# Altium PCB УШЯИ.467444.130.PcbDoc (part 1 of 4)
Units mm, origin at the board's own origin, x right, y up, seen from the top; angles counter-clockwise.
Board outline 280 x 190 mm, 6 copper layers (Top, GND, INT1, INT2, POWER, Bottom), stack 1.422 mm thick; 223 components, 176 nets, 1081 pads, 326 vias.
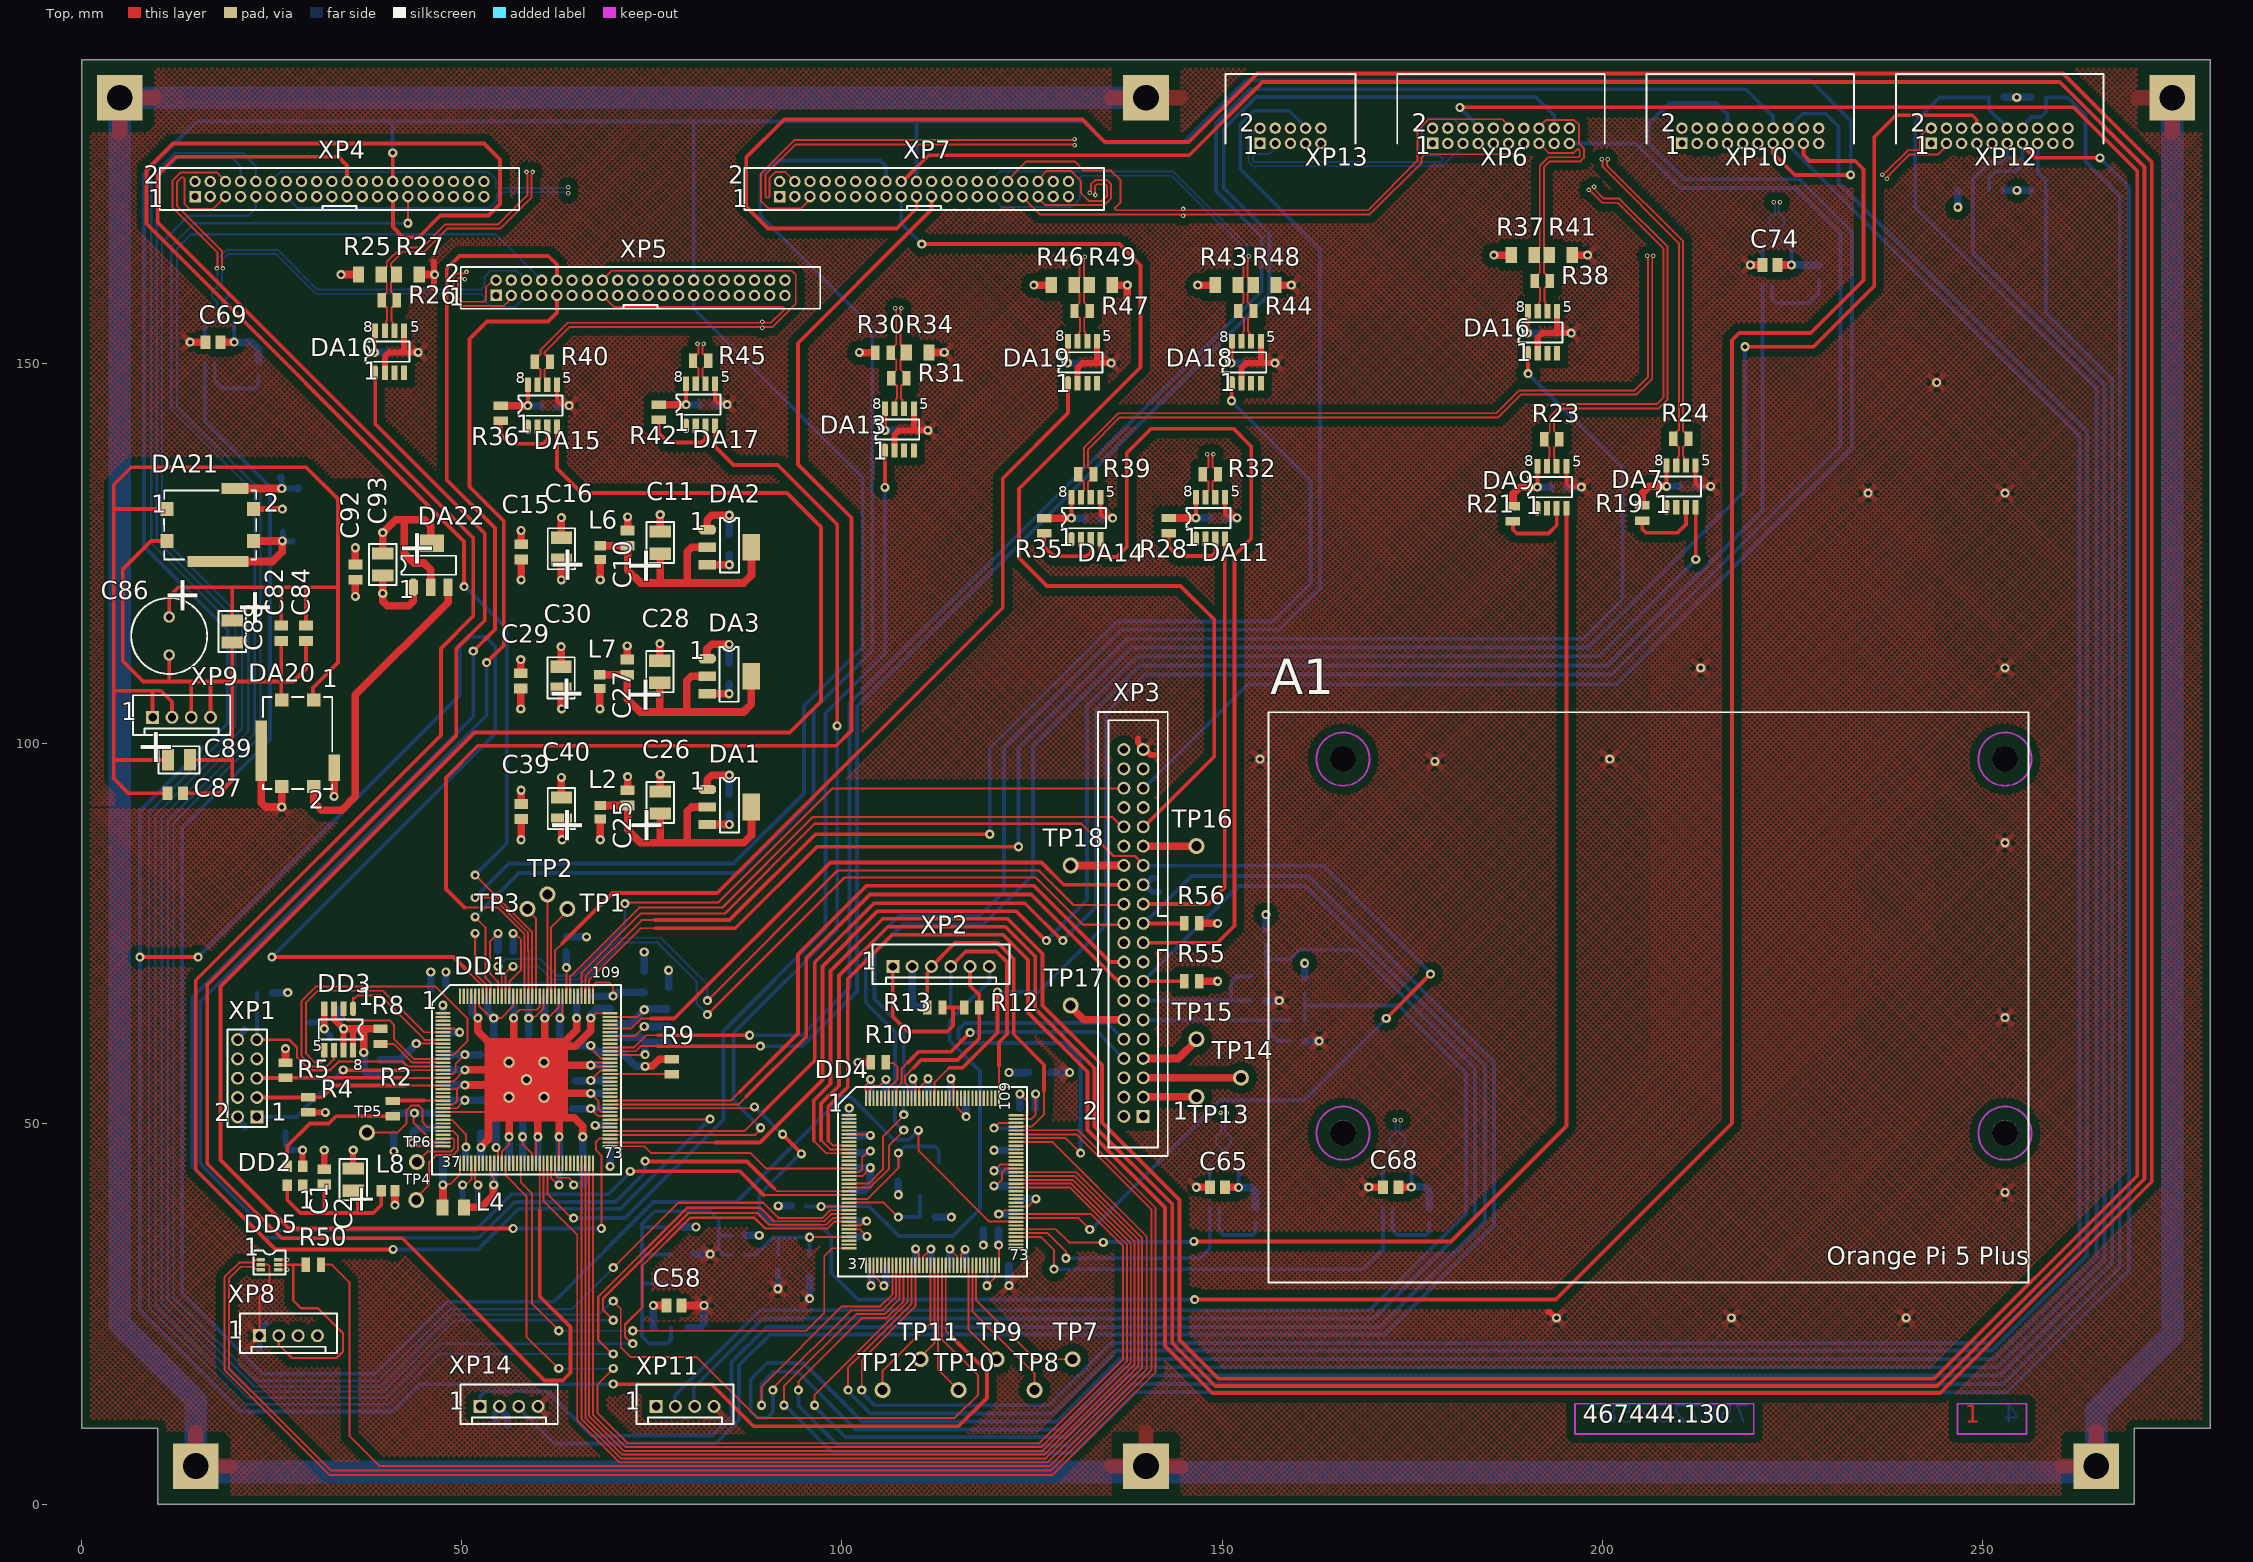
[diagram p0: Top view]
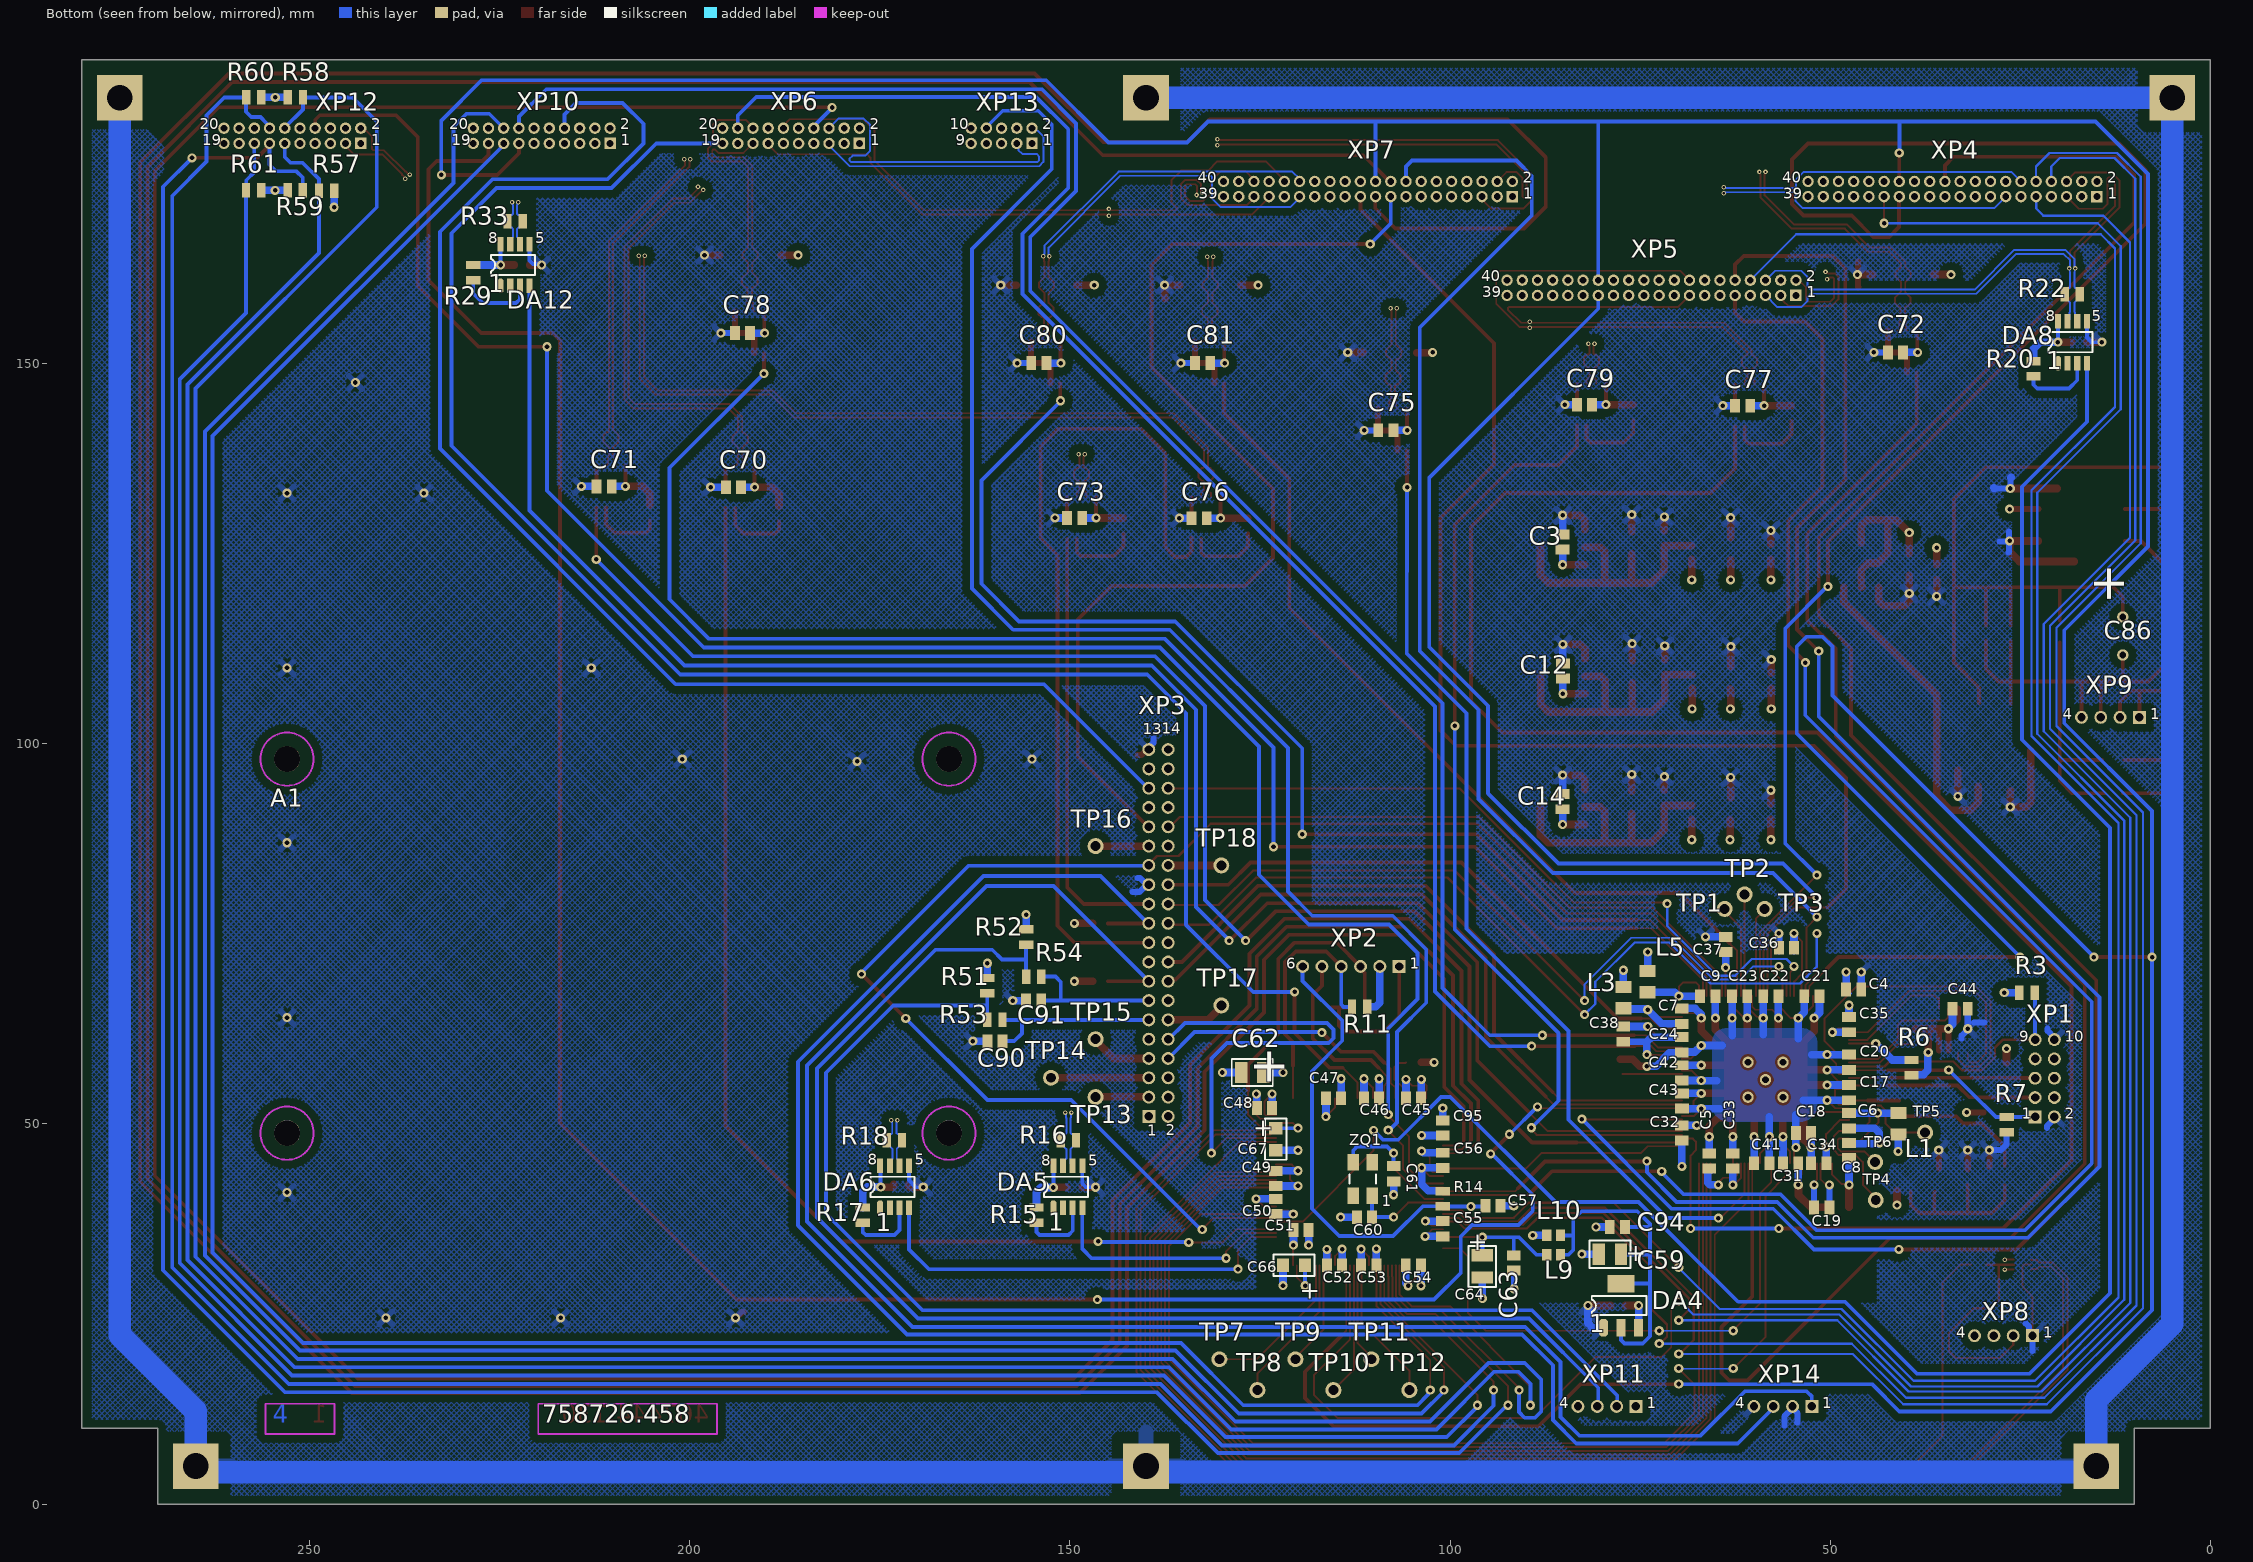
[diagram p1: Bottom view, seen from below]
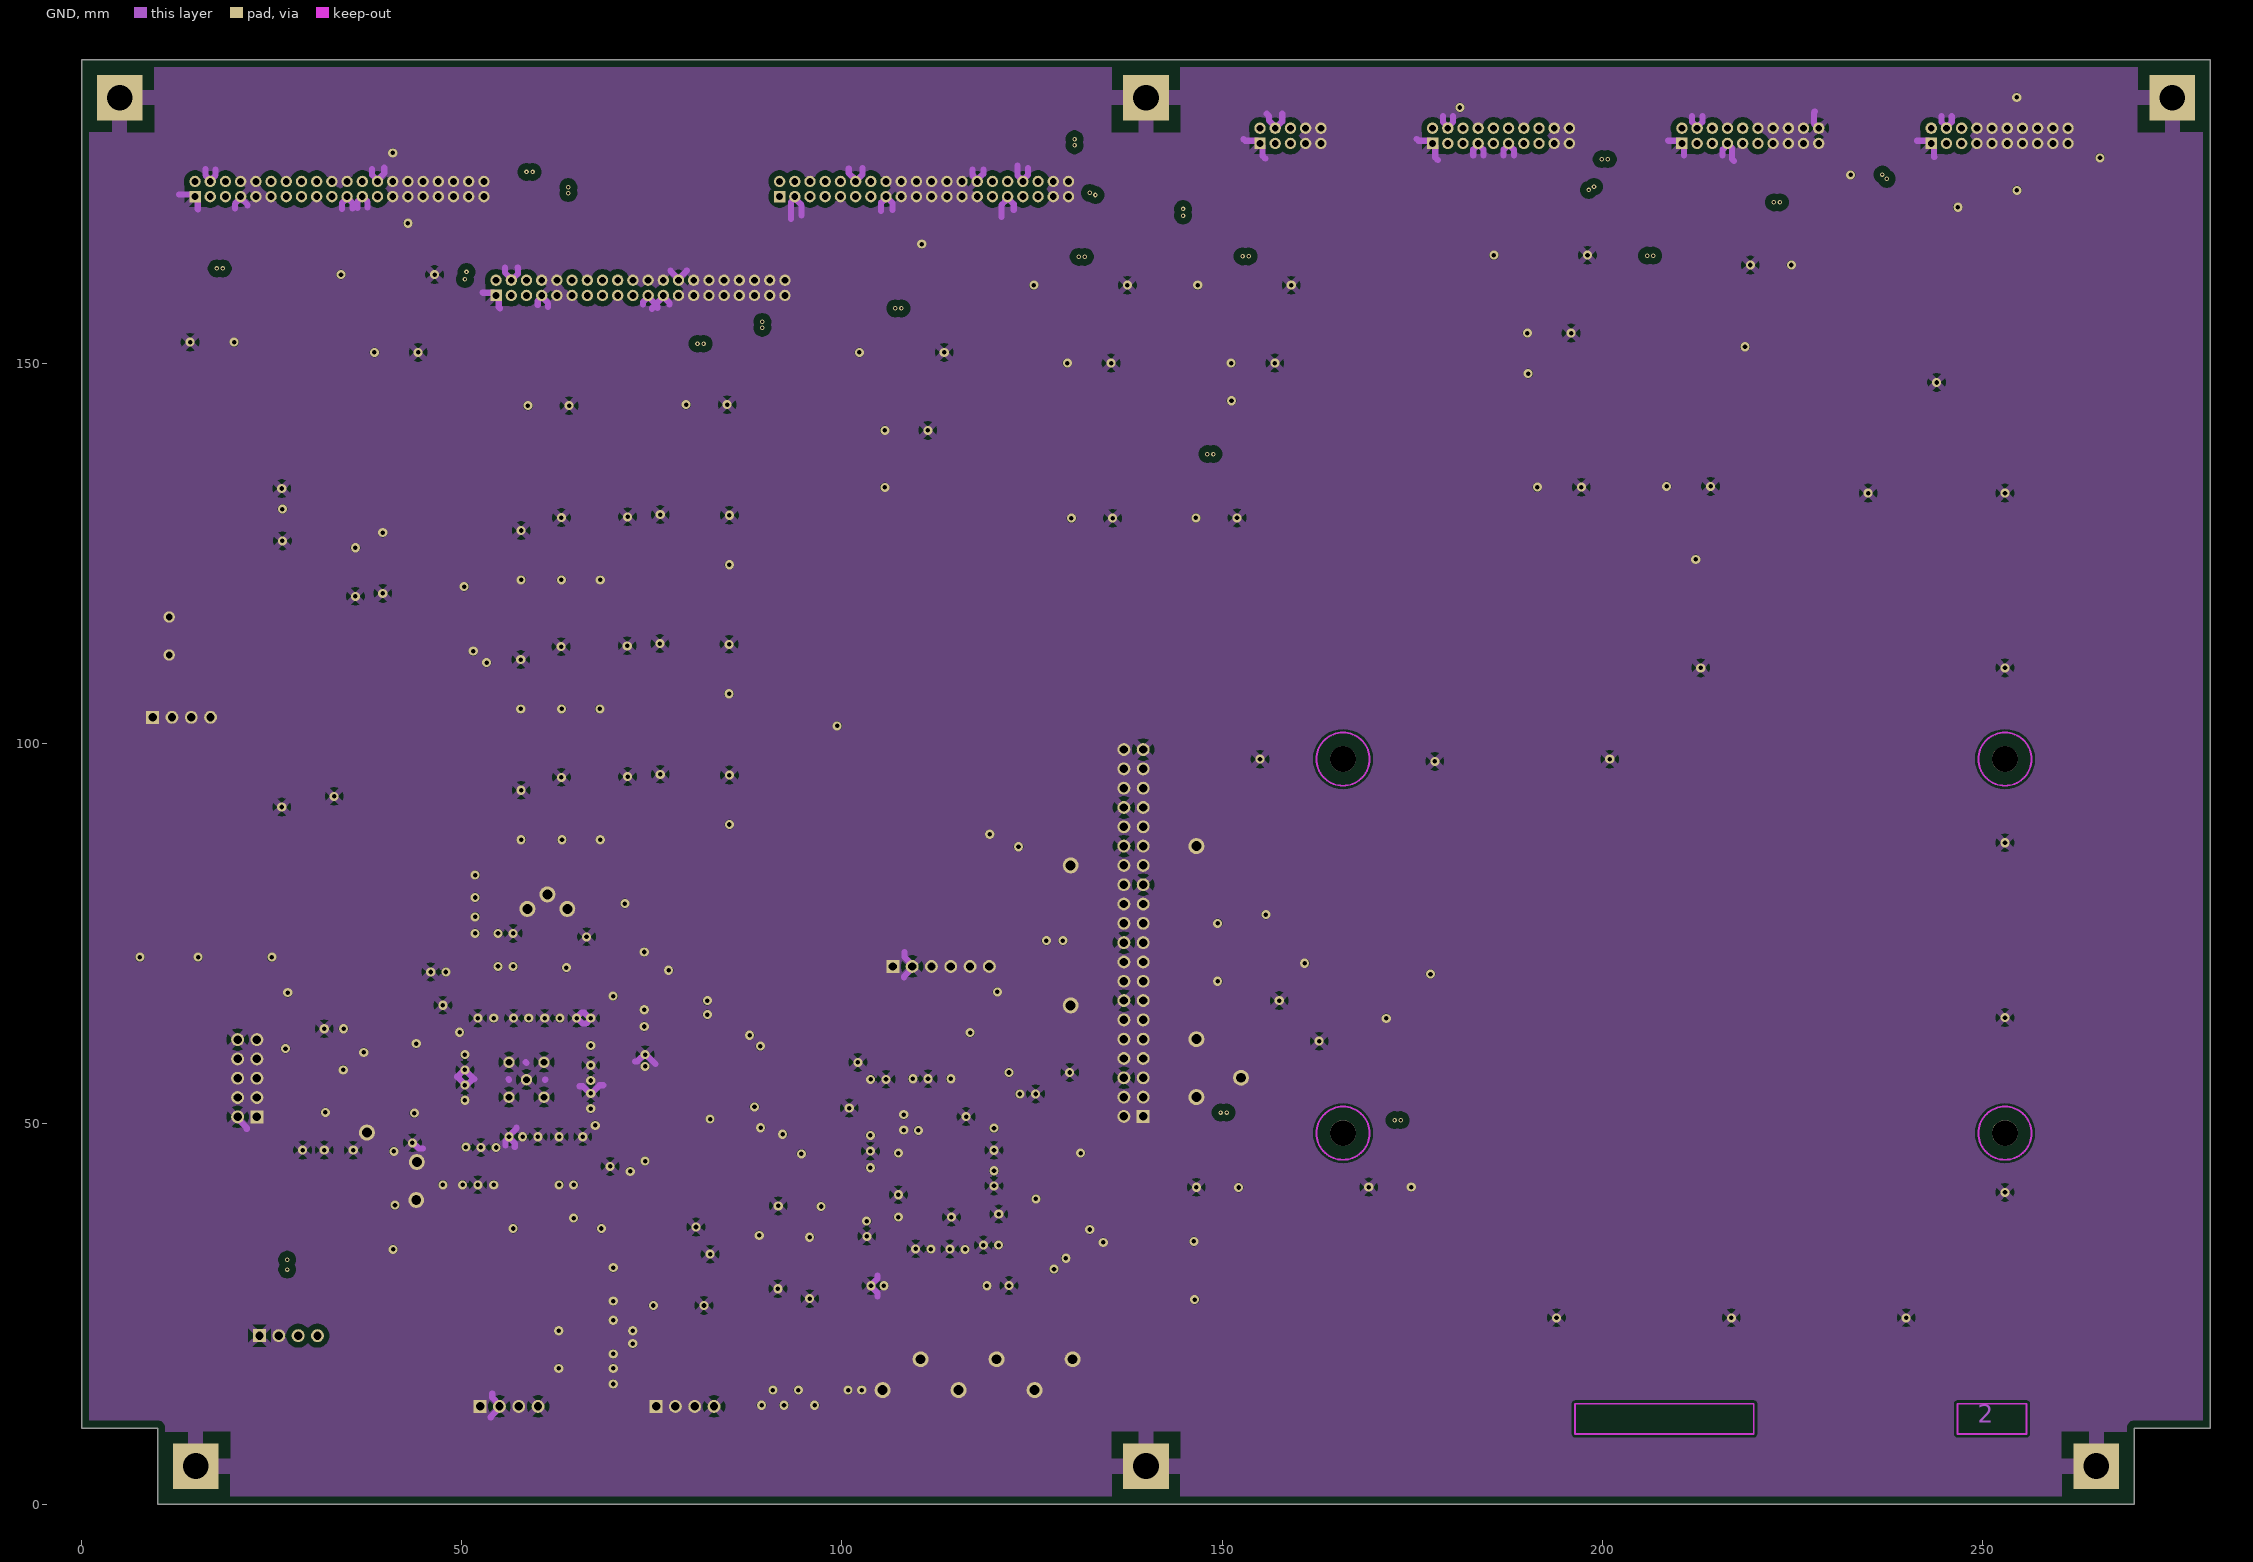
[diagram p2: GND]
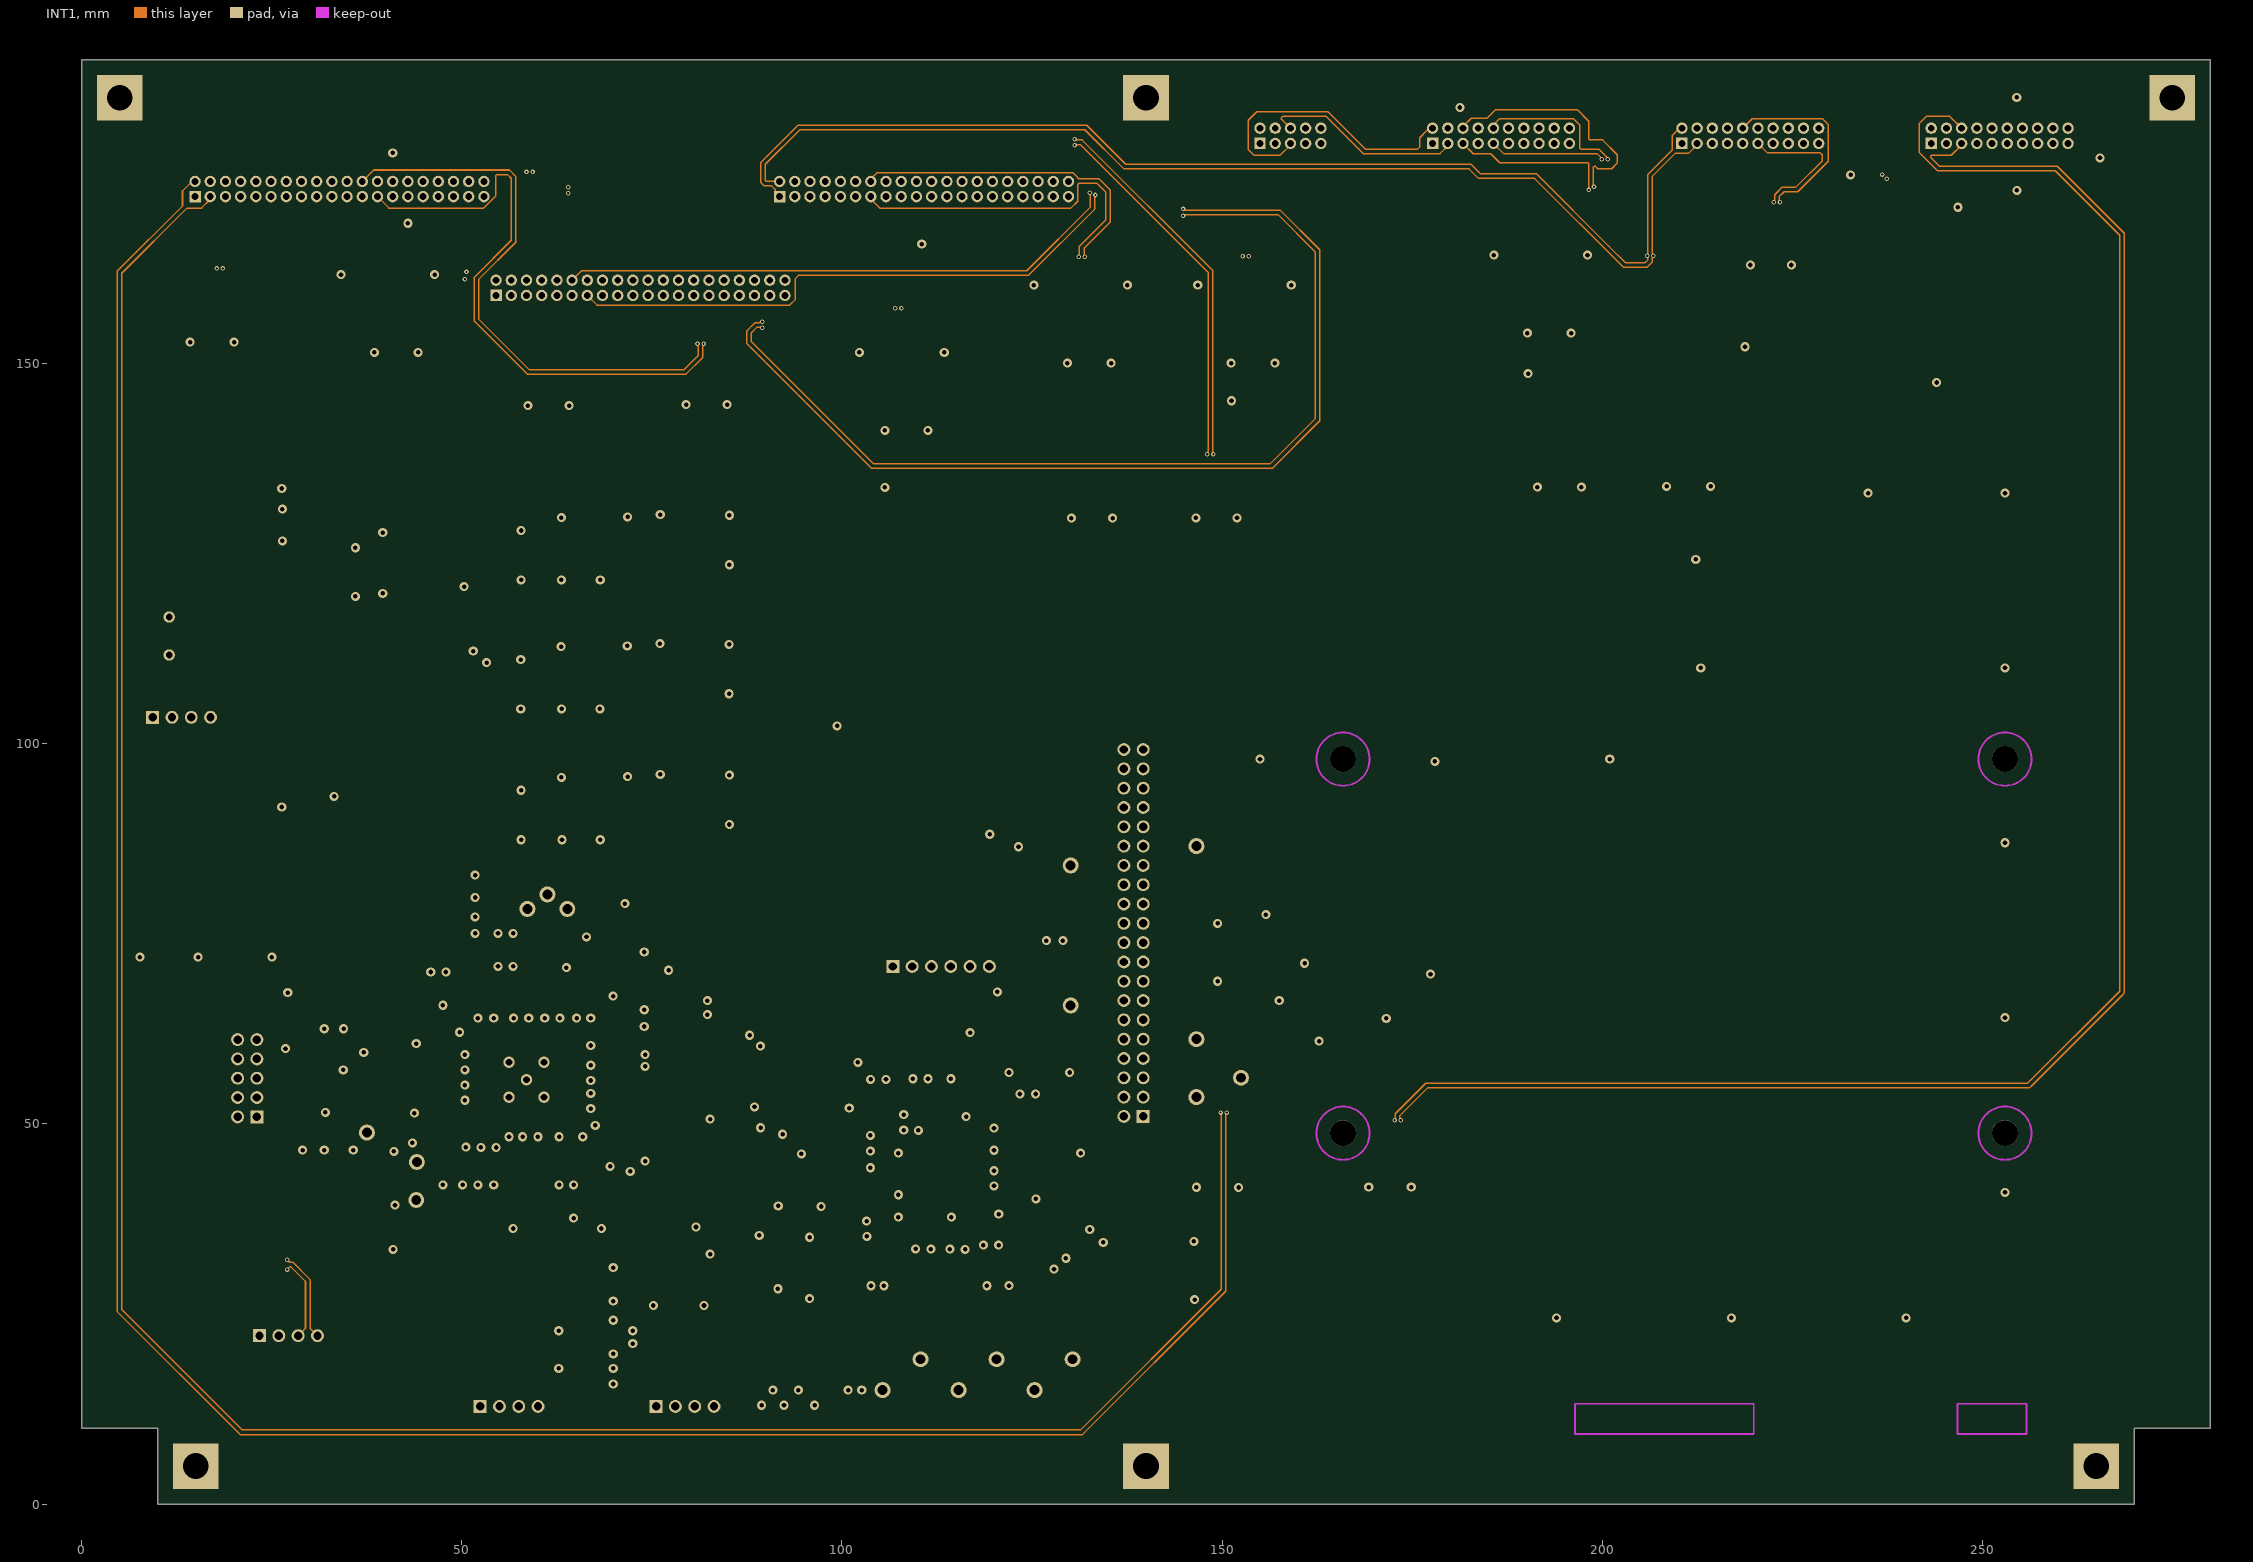
[diagram p3: INT1]
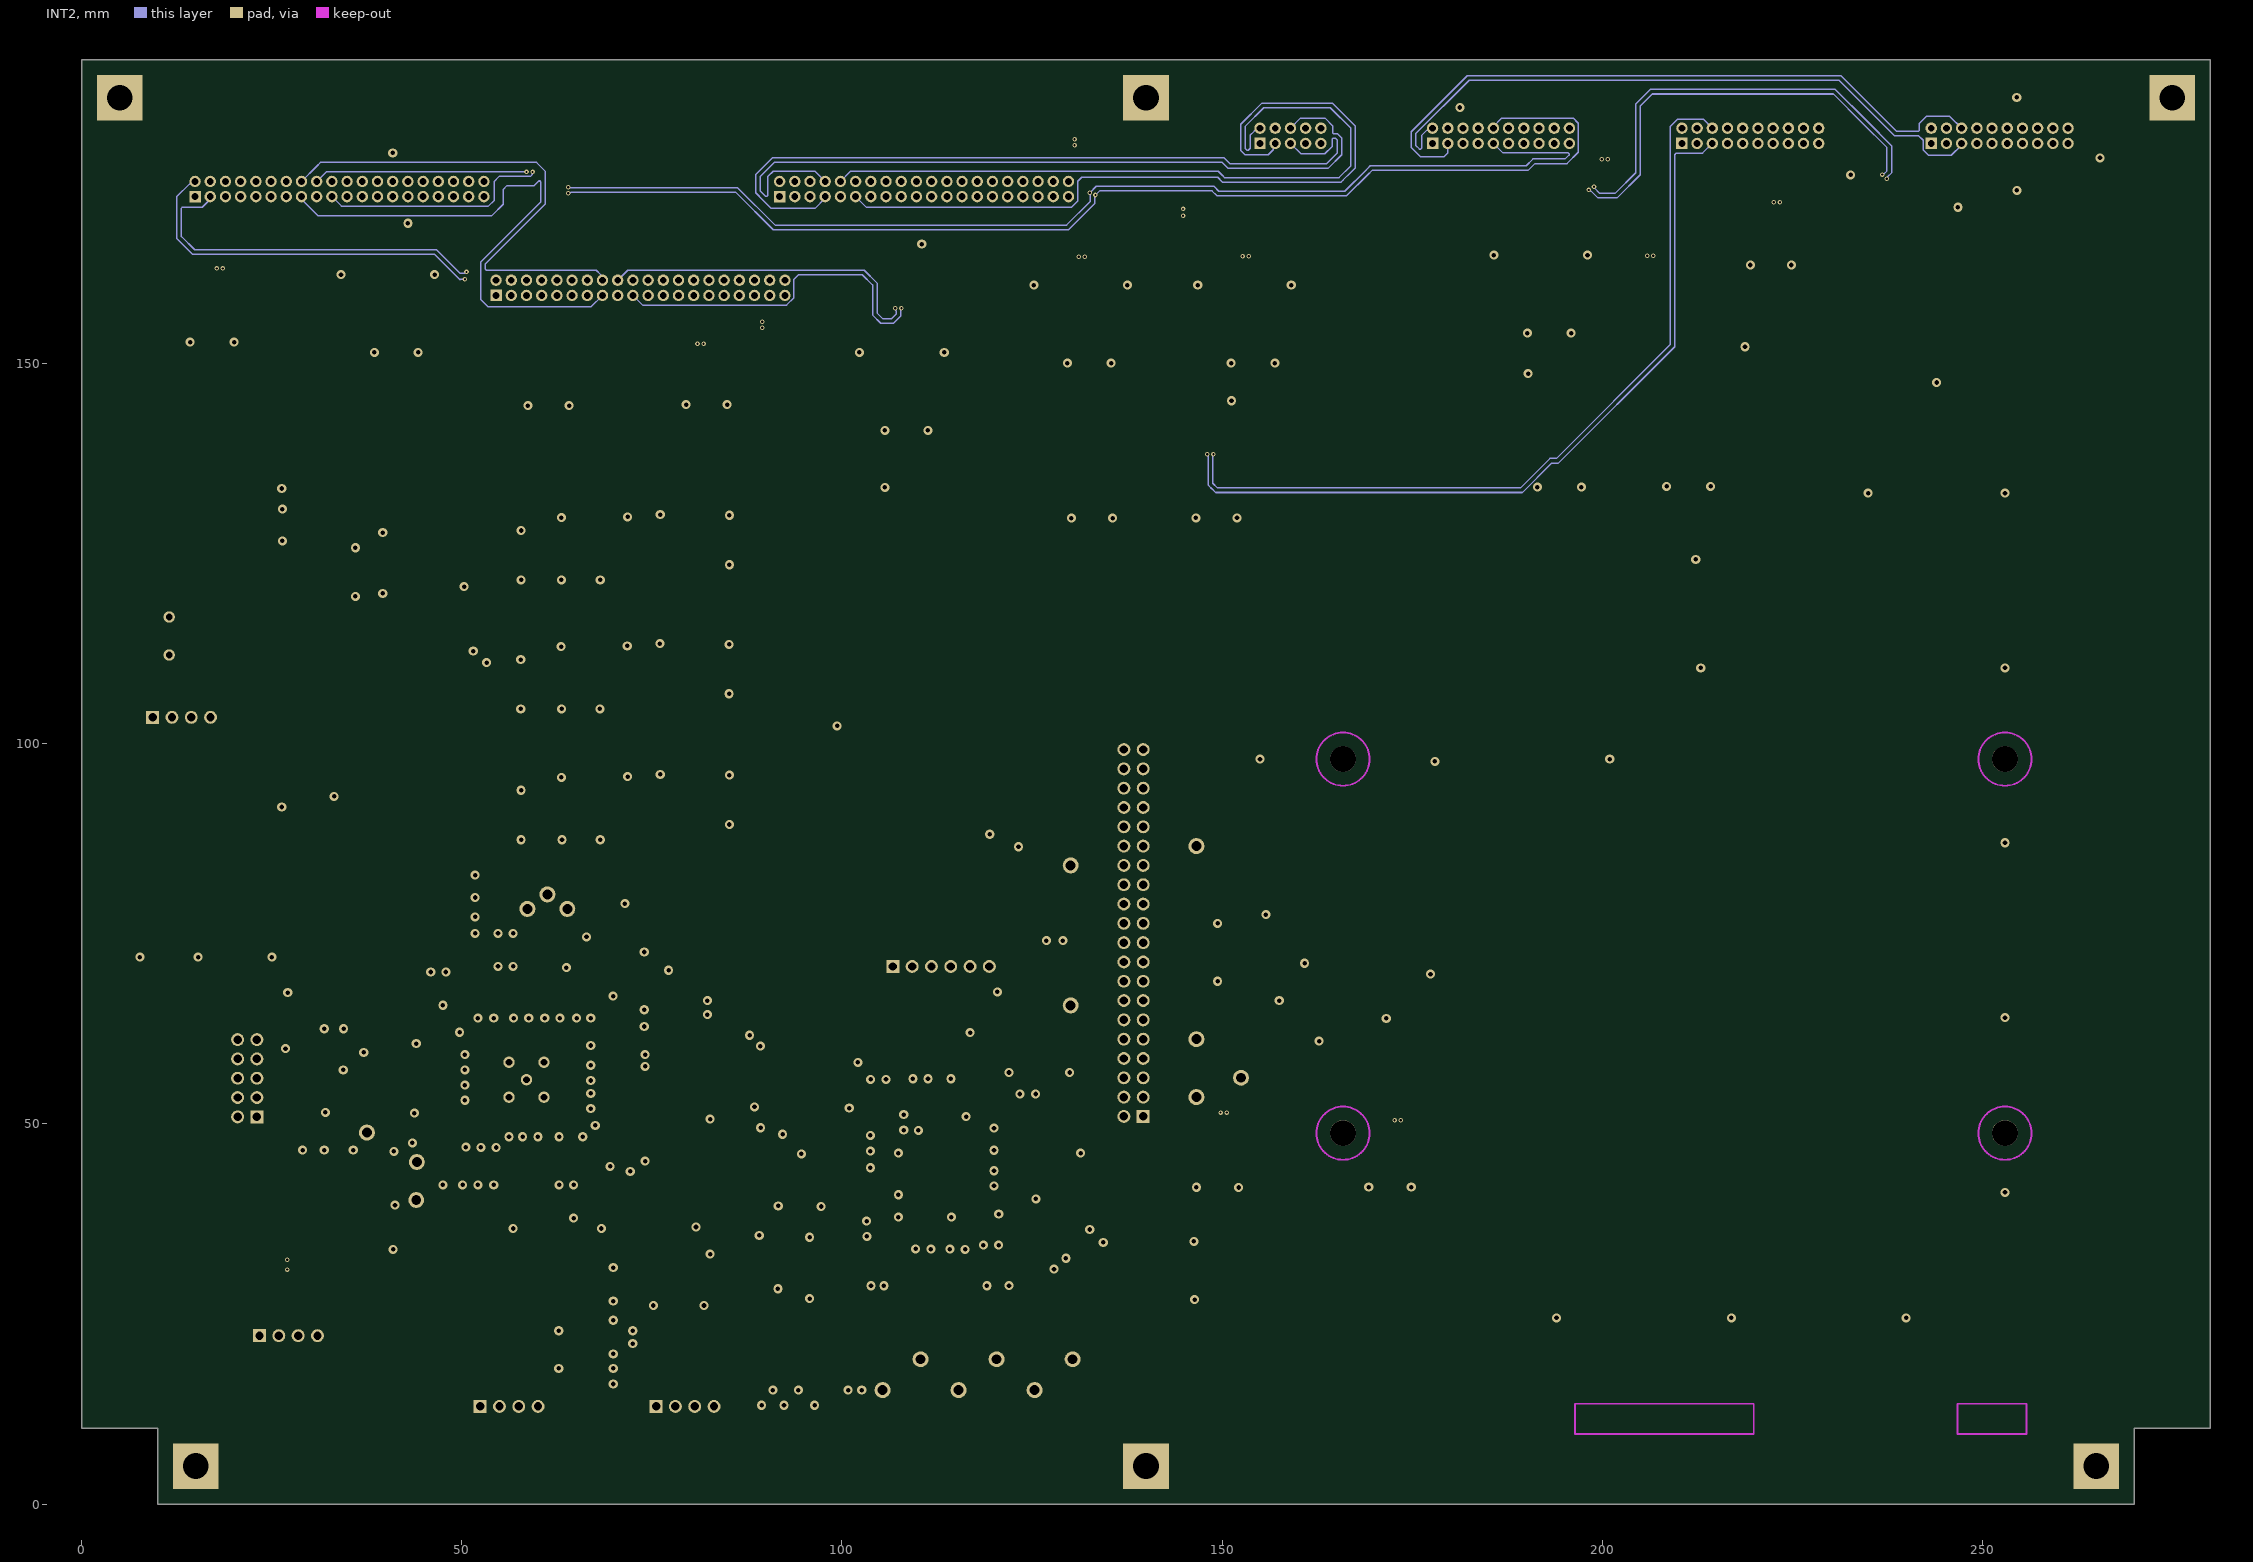
[diagram p4: INT2]
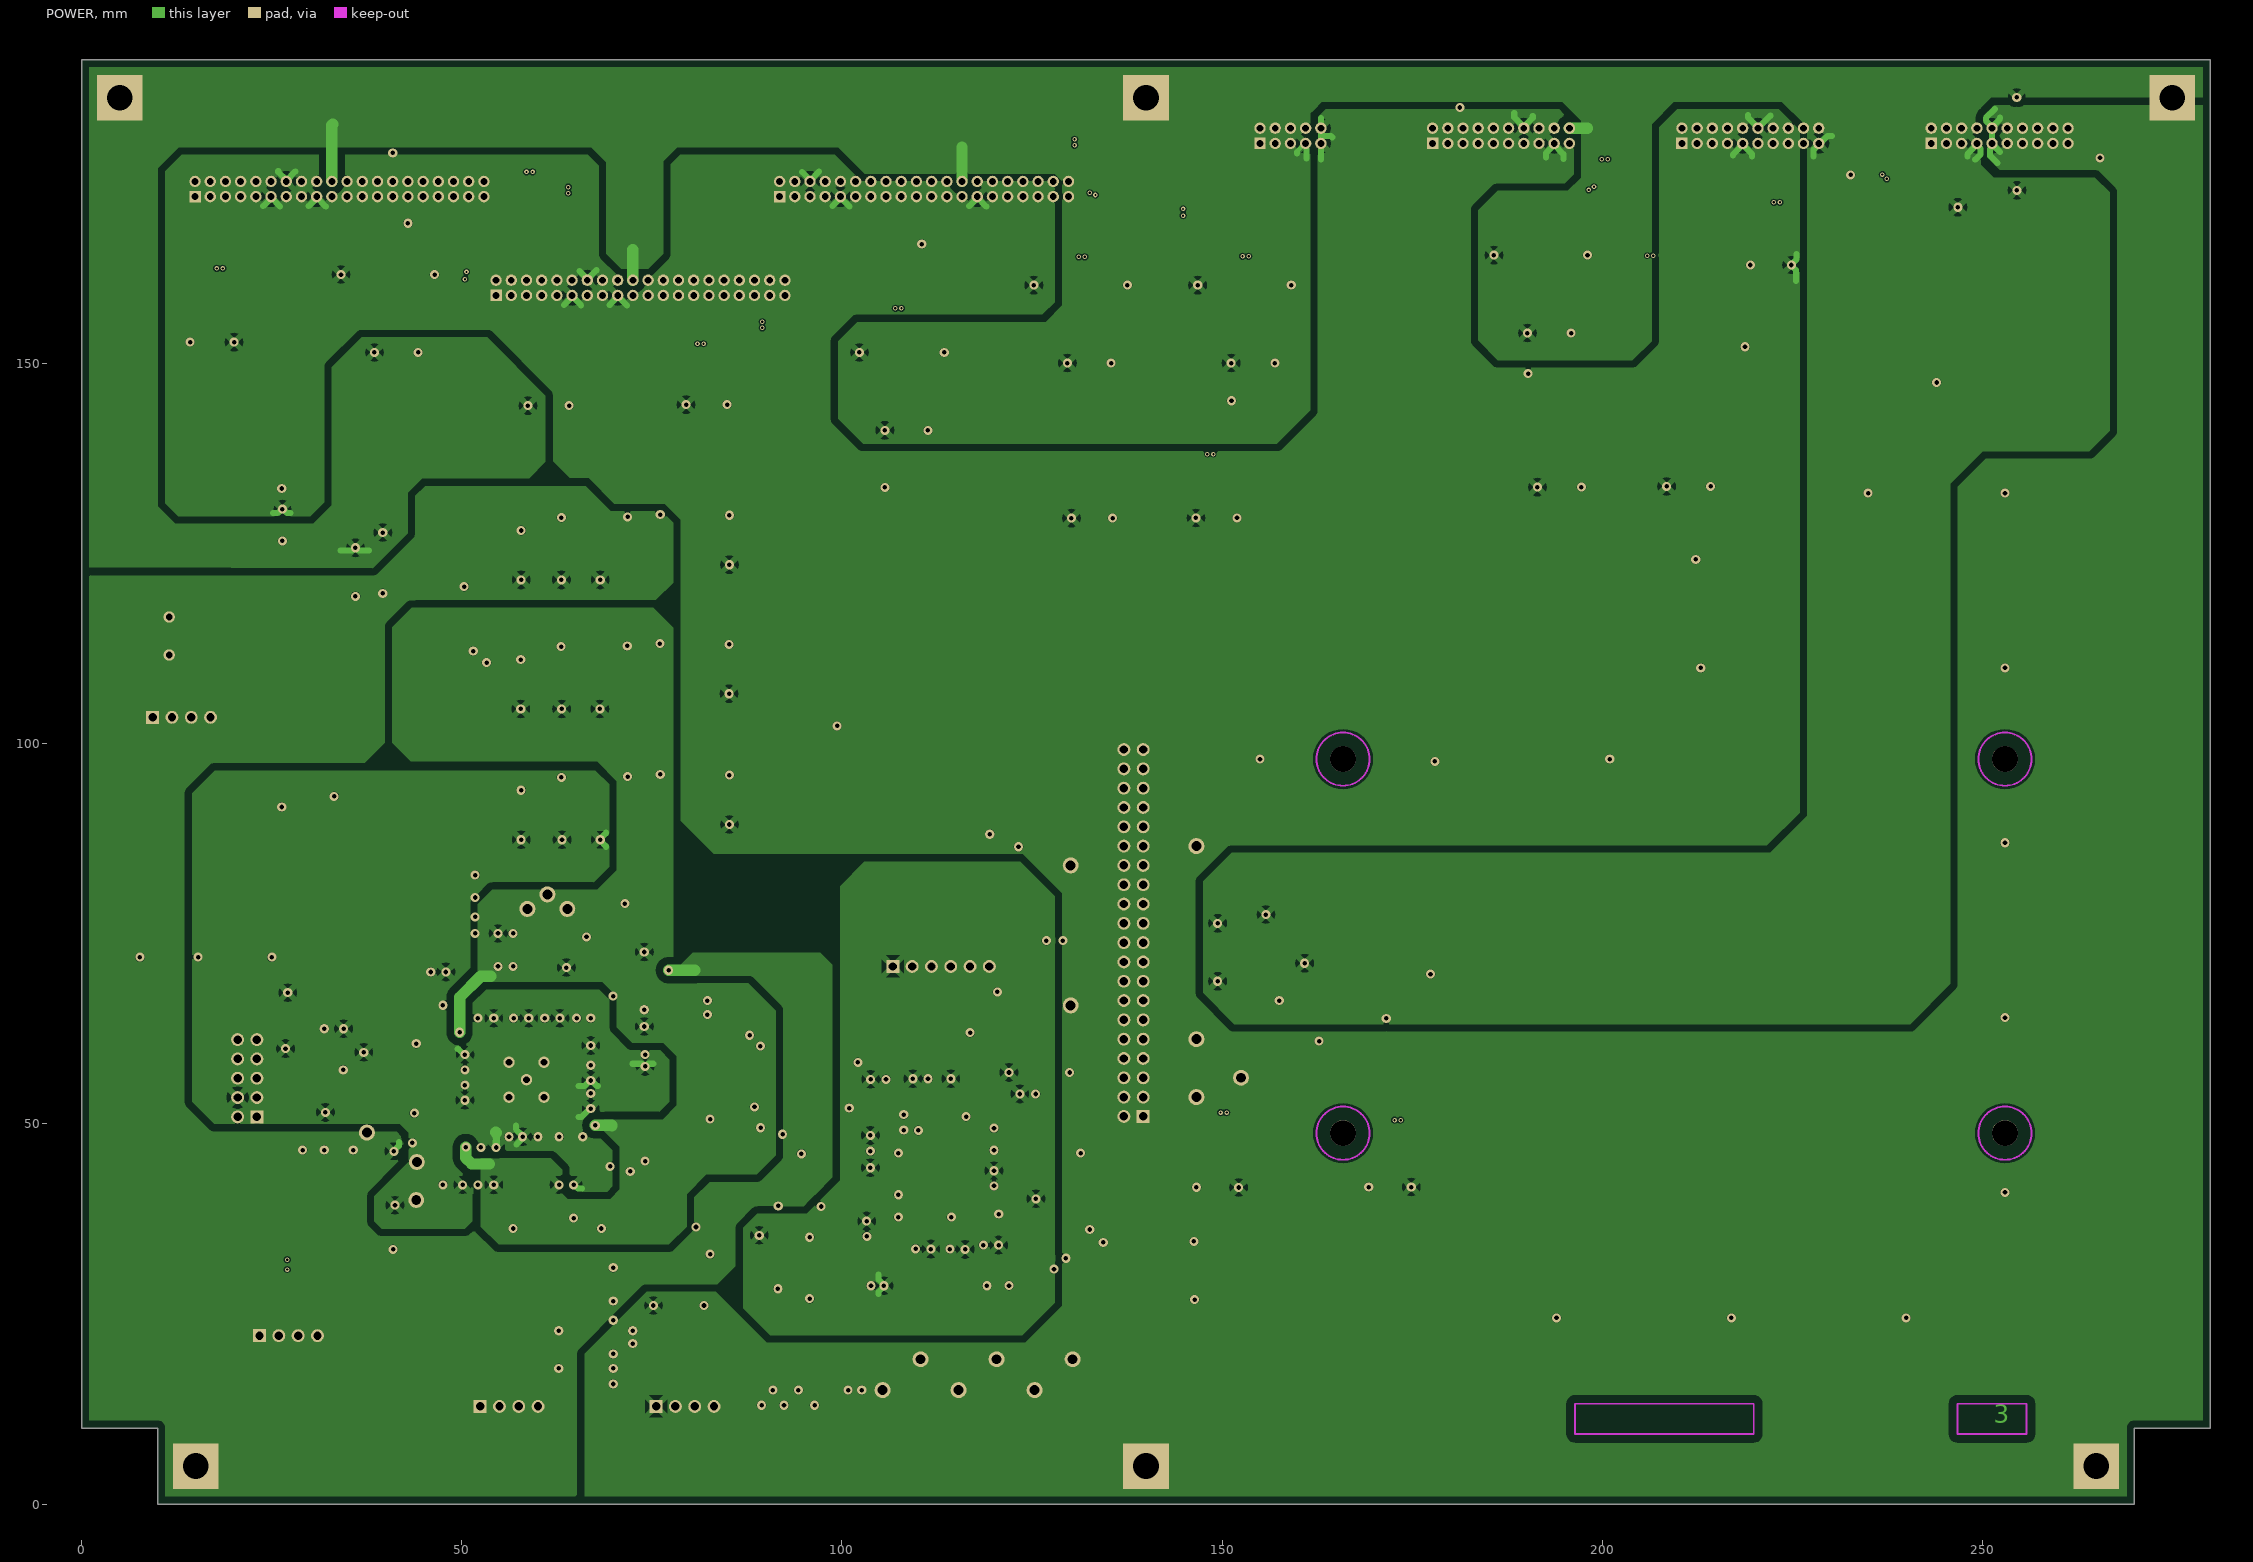
[diagram p5: POWER]

## Layer stack, top to bottom
Top Solder: solder mask 0.025, Solder Resist, Dk 3.5
Top: signal copper 0.035
Dielectric 4: prepreg 0.076, FR4 PR, Dk 3.6
Dielectric 2: prepreg 0.115, FR4 PR, Dk 4.2
GND: signal copper 0.035
Dielectric 8: core 0.3, FR4 Tg150, Dk 4.6
INT1: signal copper 0.035
Dielectric 6: prepreg 0.115, FR4 PR, Dk 4.2
Dielectric 7: prepreg 0.115, FR4 PR, Dk 4.2
INT2: signal copper 0.035
Dielectric 9: core 0.3, FR4 Tg150, Dk 4.6
POWER: signal copper 0.035
Dielectric 3: prepreg 0.115, FR4 PR, Dk 4.2
Dielectric 5: prepreg 0.076, FR4 PR, Dk 3.6
Bottom: signal copper 0.035
Bottom Solder: solder mask 0.025, Solder Resist, Dk 3.5

## Board outline
0,10 0,190 280,190 280,10 270,10 270,0 10,0 10,10

## Design rules (kind name [scope] priority, off if disabled: settings)
BoardOutlineClearance [All] p1: gap=1 ignorepadtopadclearanceinfootprint=FALSE
Clearance Clearance_Poly_GND2 [InNamedPolygon('GND2')] p1: gap=1 ignorepadtopadclearanceinfootprint=FALSE
Clearance Clearance_Poly_Kv_otv [InPolygon vs PadViaLibraryTemplate='s600h340'] p2: gap=1 ignorepadtopadclearanceinfootprint=FALSE
Clearance "Clearance_Poly POWER" [OnLayer('POWER')] p3: gap=0.2 ignorepadtopadclearanceinfootprint=FALSE except(0.3: Arc-Poly SMDPad-Poly THPad-Poly Via-Poly Fill-Poly; 1: Track-Poly Poly-Poly)
Clearance Clearance_DiffP [(InDifferentialPairClass('All Differential Pairs')) vs InAnyComponent] p4: gap=0.2 ignorepadtopadclearanceinfootprint=FALSE
Clearance Clearance_DiffP_All [(InDifferentialPairClass('All Differential Pairs'))] p5: gap=1 ignorepadtopadclearanceinfootprint=FALSE except(0.3: Arc-SMDPad Arc-THPad Arc-Via Track-SMDPad Track-THPad Track-Via SMDPad-SMDPad SMDPad-THPad SMDPad-Via THPad-THPad THPad-Via Via-Via; 0.5: Arc-Poly Track-Poly SMDPad-Poly THPad-Poly Via-Poly Fill-Poly Poly-Poly)
Clearance [All] p6: gap=0.2 ignorepadtopadclearanceinfootprint=FALSE except(0.3: Arc-Poly Track-Poly SMDPad-Poly THPad-Poly Via-Poly Fill-Poly; 1: Poly-Poly)
ComponentClearance [All] p1: gap=0 collisioncheckmode=3 verticalgap=0 showdistances=FALSE
DiffPairsRouting DiffPairsRouting_DD4 [All] p1: maxlimit=10 minlimit=0.3 mostfreqgap=0.4 toplayer_prefgap=0.3 toplayer_minwidth=0.25 toplayer_maxwidth=0.25 toplayer_prefwidth=0.25 midlayer3_mingap=0.4 midlayer3_minwidth=0.2 midlayer3_maxwidth=0.2 midlayer3_prefwidth=0.2 midlayer4_mingap=0.4 midlayer4_minwidth=0.2 midlayer4_maxwidth=0.2 midlayer4_prefwidth=0.2 bottomlayer_prefgap=0.3 bottomlayer_minwidth=0.25 bottomlayer_maxwidth=0.25 bottomlayer_prefwidth=0.25 impedanceprofiledriven=TRUE impedanceprofileid={D3FE438F-0D00-4736-99FF-3469C513B1AF} impedanceprofilevalue=100.000000 maxuncoupledlength=40
Height [All] p1: minheight=0 maxheight=80 prefheight=12.7
HoleSize [All] p1: absolutevalues=TRUE maxlimit=6 minlimit=0.3 maxpercent=80.000 minpercent=20.000
HoleToHoleClearance HoleToHoleClearance_1 [(InDifferentialPairClass('All Differential Pairs'))] p1: gap=0.5 allowstackedmicrovias=TRUE
HoleToHoleClearance [All] p2: gap=0.75 allowstackedmicrovias=TRUE
MinimumSolderMaskSliver MinimumSolderMaskSliver_DD1,4,5 [InComponent('DD1')or InComponent('DD4')or InComponent('DD5')] p1: minsoldermaskwidth=0.1
MinimumSolderMaskSliver [All] p2: minsoldermaskwidth=0.25
PlaneClearance [All] p1: clearance=0.5
PlaneConnect [All] p1: planeconnectstyle=Relief reliefexpansion=0.5 reliefentries=4 reliefconductorwidth=0.3 reliefairgap=0.3
PolygonConnect PolygonConnect_kv_otv [PadViaLibraryTemplate='s600h340'] p1: connectstyle=Relief reliefconductorwidth=2 reliefentries=4 polygonreliefangle="90 Angle" airgapwidth=1.5
PolygonConnect [All] p2: connectstyle=Relief reliefconductorwidth=0.8 reliefentries=4 polygonreliefangle="45 Angle" airgapwidth=0.6
RoomDefinition DA8 [InComponentClass('DA8')] p1: confinementstyle=ConfineIn formatcopy=TRUE lockcomponents=TRUE outline 29.85,145.85 13.35,145.85 13.35,163.55 29.85,163.55
RoomDefinition DA7 [InComponentClass('DA7')] p2: confinementstyle=ConfineIn formatcopy=TRUE lockcomponents=TRUE outline 198.675,126.875 215.175,126.875 215.175,144.575 198.675,144.575
RoomDefinition DA12 [InComponentClass('DA12')] p3: confinementstyle=ConfineIn formatcopy=TRUE lockcomponents=FALSE outline 232.5,155.75 216.25,155.75 216.25,173.5 232.5,173.5
RoomDefinition DA15 [InComponentClass('DA15')] p4: confinementstyle=ConfineIn formatcopy=TRUE lockcomponents=TRUE outline 51.1,137.25 67.35,137.25 67.35,155 51.1,155
RoomDefinition DA13 [InComponentClass('DA13')] p5: confinementstyle=ConfineIn formatcopy=TRUE lockcomponents=TRUE outline 96.95,135.847 115.45,135.847 115.45,156.347 96.95,156.347
RoomDefinition DA17 [InComponentClass('DA17')] p6: confinementstyle=ConfineIn formatcopy=TRUE lockcomponents=TRUE outline 71.9,137.384 88.15,137.384 88.15,155.134 71.9,155.134
RoomDefinition DA18 [InComponentClass('DA18')] p7: confinementstyle=ConfineIn formatcopy=TRUE lockcomponents=TRUE outline 142.6,144.7 161.1,144.7 161.1,165.2 142.6,165.2
RoomDefinition Class_+2.5V [InComponentClass('Class_+2.5V')] p8: confinementstyle=ConfineIn formatcopy=TRUE lockcomponents=TRUE outline 54.8,120.2 91.4,120.2 91.4,135.175 54.8,135.175
RoomDefinition DA9 [InComponentClass('DA9')] p9: confinementstyle=ConfineIn formatcopy=TRUE lockcomponents=TRUE outline 181.675,126.775 198.175,126.775 198.175,144.475 181.675,144.475
RoomDefinition Class_VCCIO [InComponentClass('Class_VCCIO')] p10: confinementstyle=ConfineIn formatcopy=TRUE lockcomponents=TRUE outline 54.8,86.025 91.4,86.025 91.4,101 54.8,101
RoomDefinition Class_VCINT [InComponentClass('Class_VCINT')] p11: confinementstyle=ConfineIn formatcopy=TRUE lockcomponents=TRUE outline 54.75,103.225 91.35,103.225 91.35,118.2 54.75,118.2
RoomDefinition DA10 [InComponentClass('DA10')] p12: confinementstyle=ConfineIn formatcopy=TRUE lockcomponents=TRUE outline 29.9,146.1 48.4,146.1 48.4,166.6 29.9,166.6
RoomDefinition DA11 [InComponentClass('DA11')] p13: confinementstyle=ConfineIn formatcopy=TRUE lockcomponents=TRUE outline 138.975,122.475 155.225,122.475 155.225,140.225 138.975,140.225
RoomDefinition DA16 [InComponentClass('DA16')] p14: confinementstyle=ConfineIn formatcopy=TRUE lockcomponents=TRUE outline 181.575,148.65 200.075,148.65 200.075,169.15 181.575,169.15
RoomDefinition DA19 [InComponentClass('DA19')] p15: confinementstyle=ConfineIn formatcopy=TRUE lockcomponents=TRUE outline 121.05,144.7 139.55,144.7 139.55,165.2 121.05,165.2
RoomDefinition DA14 [InComponentClass('DA14')] p16: confinementstyle=ConfineIn formatcopy=TRUE lockcomponents=TRUE outline 122.6,122.45 138.85,122.45 138.85,140.2 122.6,140.2
RoutingCorners [All] p1: cornerstyle=45-Degree minsetback=2.5 maxsetback=2.5
RoutingVias RoutingVias_DfP [InDifferentialPairClass('All Differential Pairs')] p1: holewidth=0.3 width=0.6 viastyle="Through Hole" minholewidth=0.3 minwidth=0.6 maxholewidth=0.3 maxwidth=0.6
RoutingVias [All] p2: holewidth=0.6 width=1.2 viastyle="Through Hole" minholewidth=0.3 minwidth=0.6 maxholewidth=0.9 maxwidth=1.5
SilkToSilkClearance [All] p1: silktosilkclearance=0.3
SilkToSolderMaskClearance [IsPad] p1: minsilkscreentomaskgap=0.25 clearancetoexposedcopper=TRUE
SolderMaskExpansion [All] p1: expansion=0.05 istentingtop=FALSE
SupplyNets "Schematic Supply Nets_11" [InNet('VCINT')] p1: voltage=0.000
SupplyNets "Schematic Supply Nets_10" [InNet('GND')] p2: voltage=0.000
SupplyNets "Schematic Supply Nets_9" [InNet('VCCA1')] p3: voltage=0.000
SupplyNets "Schematic Supply Nets_8" [InNet('AVCST')] p4: voltage=0.000
SupplyNets "Schematic Supply Nets_7" [InNet('DVCST')] p5: voltage=0.000
SupplyNets "Schematic Supply Nets_6" [InNet('VCC_PL1')] p6: voltage=0.000
SupplyNets "Schematic Supply Nets_5" [InNet('+3.3VB')] p7: voltage=0.000
SupplyNets "Schematic Supply Nets_4" [InNet('VCCA2')] p8: voltage=0.000
SupplyNets "Schematic Supply Nets_3" [InNet('VCC_PL2')] p9: voltage=0.000
SupplyNets "Schematic Supply Nets_2" [InNet('+2.5V')] p10: voltage=0.000
SupplyNets "Schematic Supply Nets_1" [InNet('VCCIO')] p11: voltage=0.000
SupplyNets "Schematic Supply Nets" [InNet('+5V')] p12: voltage=0.000
ViasUnderSMD [All] p1: allowed=FALSE
Width Width_DD4 [InComponent('DD4')] p1: maxlimit=5 minlimit=0.25 preferedwidth=0.25
Width [All] p2: maxlimit=5 minlimit=0.25 preferedwidth=0.3
19 further rules are at their usual default settings.

## Classes and differential pairs
component class DA9: C70 DA9 R21 R23
component class DA8: C69 DA8 R20 R22
component class DA7: C71 DA7 R19 R24
component class DA19: C81 DA19 R46 R47 R49
component class DA18: C80 DA18 R43 R44 R48
component class DA17: C79 DA17 R42 R45
component class DA16: C78 DA16 R37 R38 R41
component class DA15: C77 DA15 R36 R40
component class DA14: C76 DA14 R35 R39
component class DA13: C75 DA13 R30 R31 R34
component class DA12: C74 DA12 R29 R33
component class DA11: C73 DA11 R28 R32
component class DA10: C72 DA10 R25 R26 R27
component class Class_VCINT: C12 C27 C28 C29 C30 DA3 L7
component class Class_VCCIO: C14 C25 C26 C39 C40 DA1 L2
component class Class_+2.5V: C3 C10 C11 C15 C16 DA2 L6
component class УШЯИ.467444.130Э3_5: C90 C91 R51 R52 R53 R54 R55 R56 R57 R58 R59 R60 R61 XP10 XP11 XP12 XP13 XP14
component class УШЯИ.467444.130Э3_4: C82 C84 C86 C87 C88 C89 C92 C93 DA20 DA21 DA22 DD5 R50 TP13 TP14 TP15 TP16 TP17 TP18 XP3 XP4 XP5 XP6 XP7 XP8 XP9
component class УШЯИ.467444.130Э3_3: C72 C73 C74 C75 C76 C77 C78 C79 C80 C81 DA10 DA11 DA12 DA13 DA14 DA15 DA16 DA17 DA18 DA19 R25 R26 R27 R28 R29 R30 R31 R32 R33 R34 R35 R36 R37 R38 R39 R40 R41 R42 R43 R44 R45 R46 R47 R48 R49
component class УШЯИ.467444.130Э3_2: C45 C46 C47 C48 C49 C50 C51 C52 C53 C54 C55 C56 C57 C58 C59 C60 C61 C62 C63 C64 C65 C66 C67 C68 C69 C70 C71 C94 C95 DA4 DA5 DA6 DA7 DA8 DA9 DD4 L9 L10 R10 R11 R12 R13 R14 R15 R16 R17 R18 R19 R20 R21 R22 R23 R24 TP7 TP8 TP9 TP10 TP11 TP12 XP2 ZQ1
component class УШЯИ.467444.130Э3_1: A1 C1 C2 C3 C4 C5 C6 C7 C8 C9 C10 C11 C12 C14 C15 C16 C17 C18 C19 C20 C21 C22 C23 C24 C25 C26 C27 C28 C29 C30 C31 C32 C33 C34 C35 C36 C37 C38 C39 C40 C41 C42 C43 C44 DA1 DA2 DA3 DD1 DD2 DD3 L1 L2 L3 L4 L5 L6 L7 L8 R2 R3 R4 R5 R6 R7 R8 R9 TP1 TP2 TP3 TP4 TP5 TP6 XP1
differential pair RUN: +RUN_p -RUN_n
differential pair LINE: +LINE_p -LINE_n
differential pair IMPC: +IMPC_p -IMPC_n
differential pair IMPB: +IMPB_p -IMPB_n
differential pair DAT_DDAC: +DAT_DDAC_p -DAT_DDAC_n
differential pair DAT_ADC4: +DAT_ADC4_p -DAT_ADC4_n
differential pair DAT_ADC3: +DAT_ADC3_p -DAT_ADC3_n
differential pair DAT_ADC2: +DAT_ADC2_p -DAT_ADC2_n
differential pair DAT_ADC1: +DAT_ADC1_p -DAT_ADC1_n
differential pair DAT2_DAC: +DAT2_DAC_p -DAT2_DAC_n
differential pair DAT1_DAC: +DAT1_DAC_p -DAT1_DAC_n
differential pair D1: +D1_p -D1_n
differential pair D1A: +D1A_p -D1A_n
differential pair CLK_DDAC: +CLK_DDAC_p -CLK_DDAC_n
differential pair CLK_ADC: +CLK_ADC_p -CLK_ADC_n
differential pair CLK2_DAC: +CLK2_DAC_p -CLK2_DAC_n
differential pair CLK1_DAC: +CLK1_DAC_p -CLK1_DAC_n

## Components (designator, comment, footprint, x,y, rotation, side; value= is the part's Value field where it differs from the comment)
A1 "Orange Pi 5 Plus" Orange_Pi_5_Plus 253,98 r0 top locked
C1 "0,1 µF" "C_0805 [2012 Metric]" 31.899,43.049 r270 top
C2 "4,7 µF" "C+_1210 [3528-21 Metric]" 35.705,42.675 r90 top
C3 "0,1 µF" "C_0805 [2012 Metric]" 85.2,126.575 r270 bottom
C4 "1 µF" "C_0805 [2012 Metric]" 46.9,67.7 r0 bottom
C5 "1 µF" "C_0805 [2012 Metric]" 65.9,45.125 r270 bottom
C6 "0,1 µF" "C_0805 [2012 Metric]" 47.512,50.425 r90 bottom
C7 "0,1 µF" "C_0805 [2012 Metric]" 69.5,64.175 r270 bottom
C8 "0,1 µF" "C_0805 [2012 Metric]" 47.512,46.525 r270 bottom
C9 "0,1 µF" "C_0805 [2012 Metric]" 66.1,66.825 r0 bottom
C10 "0,1 µF" "C_0805 [2012 Metric]" 71.8,127.075 r270 top
C11 "4,7 µF" "C+_1210 [3528-21 Metric]" 76.1,126.475 r90 top
C12 "0,1 µF" "C_0805 [2012 Metric]" 85.15,109.6 r270 bottom
C14 "0,1 µF" "C_0805 [2012 Metric]" 85.2,92.4 r270 bottom
C15 "0,1 µF" "C_0805 [2012 Metric]" 57.8,125.275 r270 top
C16 "10 µF" "C+_1210 [3528-21 Metric]" 63.1,125.675 r90 top
C17 "0,1 µF" "C_0805 [2012 Metric]" 47.512,54.125 r270 bottom
C18 "0,1 µF" "C_0805 [2012 Metric]" 53.5,48.825 r0 bottom
C19 "0,1 µF" "C_0805 [2012 Metric]" 51.1,39.025 r180 bottom
C20 "0,1 µF" "C_0805 [2012 Metric]" 47.512,58.125 r90 bottom
C21 "0,1 µF" "C_0805 [2012 Metric]" 52.4,66.825 r0 bottom
C22 "0,1 µF" "C_0805 [2012 Metric]" 57.8,66.825 r0 bottom
C23 "0,1 µF" "C_0805 [2012 Metric]" 61.9,66.825 r0 bottom
C24 "0,1 µF" "C_0805 [2012 Metric]" 69.5,60.425 r270 bottom
C25 "0,1 µF" "C_0805 [2012 Metric]" 71.8,92.9 r270 top
C26 "4,7 µF" "C+_1210 [3528-21 Metric]" 76.1,92.3 r90 top
C27 "0,1 µF" "C_0805 [2012 Metric]" 71.75,110.1 r270 top
C28 "4,7 µF" "C+_1210 [3528-21 Metric]" 76.05,109.5 r90 top
C29 "0,1 µF" "C_0805 [2012 Metric]" 57.75,108.3 r270 top
C30 "4,7 µF" "C+_1210 [3528-21 Metric]" 63.05,108.7 r90 top
C31 "0,1 µF" "C_0805 [2012 Metric]" 55.2,44.825 r180 bottom
C32 "0,1 µF" "C_0805 [2012 Metric]" 69.5,48.825 r90 bottom
C33 "0,1 µF" "C_0805 [2012 Metric]" 62.8,45.125 r270 bottom
C34 "0,1 µF" "C_0805 [2012 Metric]" 51.5,44.825 r180 bottom
C35 "0,1 µF" "C_0805 [2012 Metric]" 47.512,63.075 r270 bottom
C36 "0,1 µF" "C_0805 [2012 Metric]" 55.75,73.2 r180 bottom
C37 "0,1 µF" "C_0805 [2012 Metric]" 63.75,73.625 r270 bottom
C38 "0,1 µF" "C_0805 [2012 Metric]" 77.2,61.825 r90 bottom
C39 "0,1 µF" "C_0805 [2012 Metric]" 57.8,91.1 r270 top
C40 "10 µF" "C+_1210 [3528-21 Metric]" 63.1,91.5 r90 top
C41 "0,1 µF" "C_0805 [2012 Metric]" 59,44.825 r180 bottom
C42 "0,1 µF" "C_0805 [2012 Metric]" 69.5,56.725 r270 bottom
C43 "0,1 µF" "C_0805 [2012 Metric]" 69.488,53.025 r270 bottom
C44 "0,1 µF" "C_0805 [2012 Metric]" 32.9,65.175 r0 bottom
C45 "0,1 µF" "C_0805 [2012 Metric]" 104.8,53.375 r180 bottom
C46 "0,1 µF" "C_0805 [2012 Metric]" 110.325,53.375 r180 bottom
C47 "0,1 µF" "C_0805 [2012 Metric]" 115.325,53.375 r180 bottom
C48 "0,1 µF" "C_0805 [2012 Metric]" 124.4,52.1 r180 bottom
C49 "0,1 µF" "C_0805 [2012 Metric]" 122.925,42.825 r90 bottom
C50 "0,1 µF" "C_0805 [2012 Metric]" 122.925,39.15 r90 bottom
C51 "0,1 µF" "C_0805 [2012 Metric]" 119.6,36.05 r0 bottom
C52 "0,1 µF" "C_0805 [2012 Metric]" 115.2,31.425 r0 bottom
C53 "0,1 µF" "C_0805 [2012 Metric]" 110.7,31.425 r0 bottom
C54 "0,1 µF" "C_0805 [2012 Metric]" 104.825,31.425 r0 bottom
C55 "0,1 µF" "C_0805 [2012 Metric]" 100.95,36.225 r90 bottom
C56 "0,1 µF" "C_0805 [2012 Metric]" 100.95,45.225 r270 bottom
C57 "0,1 µF" "C_0805 [2012 Metric]" 94.35,39.225 r0 bottom
C58 "0,1 µF" "C_0805 [2012 Metric]" 77.9,26.125 r0 top
C59 "4,7 µF" "C+_1210 [3528-21 Metric]" 78.981,32.85 r0 bottom
C60 "20 pF" "C_0805 [2012 Metric]" 111.25,37.75 r0 bottom
C61 "20 pF" "C_0805 [2012 Metric]" 107.425,43.45 r270 bottom
C62 "10 µF" "C+_1210 [3528-21 Metric]" 126.025,56.775 r0 bottom
C63 "0,1 µF" "C_0805 [2012 Metric]" 91.625,31.725 r90 bottom
C64 "10 µF" "C+_1210 [3528-21 Metric]" 95.75,31.275 r270 bottom
C65 "0,1 µF" "C_0805 [2012 Metric]" 149.4,41.7 r0 top
C66 "2,2 µF" "C+_1206 [3216-18 Metric]" 120.525,31.425 r0 bottom
C67 "2,2 µF" "C+_1206 [3216-18 Metric]" 122.925,48 r270 bottom
C68 "0,1 µF" "C_0805 [2012 Metric]" 172.2,41.7 r0 top
C69 "0,1 µF" "C_0805 [2012 Metric]" 17.25,152.85 r0 top
C70 "0,1 µF" "C_0805 [2012 Metric]" 194.275,133.775 r180 bottom
C71 "0,1 µF" "C_0805 [2012 Metric]" 211.275,133.875 r180 bottom
C72 "0,1 µF" "C_0805 [2012 Metric]" 41.4,151.5 r180 bottom
C73 "0,1 µF" "C_0805 [2012 Metric]" 149.38,129.725 r180 bottom
C74 "0,1 µF" "C_0805 [2012 Metric]" 222.095,163 r0 top
C75 "0,1 µF" "C_0805 [2012 Metric]" 108.45,141.247 r180 bottom
C76 "0,1 µF" "C_0805 [2012 Metric]" 133.005,129.7 r180 bottom
C77 "0,1 µF" "C_0805 [2012 Metric]" 61.505,144.5 r180 bottom
C78 "0,1 µF" "C_0805 [2012 Metric]" 193.075,154.05 r180 bottom
C79 "0,1 µF" "C_0805 [2012 Metric]" 82.305,144.634 r180 bottom
C80 "0,1 µF" "C_0805 [2012 Metric]" 154.1,150.1 r180 bottom
C81 "0,1 µF" "C_0805 [2012 Metric]" 132.55,150.1 r180 bottom
C82 "0,1 µF" "C_0805 [2012 Metric]" 26.25,114.563 r270 top
C84 "0,1 µF" "C_0805 [2012 Metric]" 29.5,114.563 r270 top
C86 "1000 µF" С_EXR_10x21 11.5,114.2 r270 top
C87 "0,1 µF" "C_0805 [2012 Metric]" 12.3,93.5 r180 top
C88 "10 µF" "C+_1210 [3528-21 Metric]" 19.8,114.8 r270 top
C89 "10 µF" "C+_1210 [3528-21 Metric]" 12.771,97.9 r0 top
C90 "0,1 µF" "C_0805 [2012 Metric]" 159.875,60.9 r0 bottom
C91 "0,1 µF" "C_0805 [2012 Metric]" 154.775,66.236 r0 bottom
C92 "0,1 µF" "C_0805 [2012 Metric]" 36,122.6 r90 top
C93 "10 µF" "C+_1210 [3528-21 Metric]" 39.6,123.6 r270 top
C94 "0,1 µF" "C_0805 [2012 Metric]" 78,36.45 r180 bottom
C95 "0,1 µF" "C_0805 [2012 Metric]" 100.95,49.475 r270 bottom
DA1 "LD1117AS33TR" SOT-223 85.2,91.7 r0 top
DA2 "LD1117AS25TR" SOT-223 85.2,125.875 r0 top
DA3 "LD1117AS12TR" SOT-223 85.15,108.9 r0 top
DA4 "LD1117AS33TR" SOT-223 77.506,26.1 r90 bottom
DA5 "ADM483AR" SOIC-8_1.27_5x4x1.75 150.28,41.742 r90 bottom
DA6 "ADM483AR" SOIC-8_1.27_5x4x1.75 173.07,41.742 r90 bottom
DA7 "ADM483AR" SOIC-8_1.27_5x4x1.75 210.394,133.875 r90 top
DA8 "ADM483AR" SOIC-8_1.27_5x4x1.75 18.131,152.85 r90 bottom
DA9 "ADM483AR" SOIC-8_1.27_5x4x1.75 193.394,133.775 r90 top
DA10 "SN65HVD75D" SOIC-8_1.27_5x4x1.75 40.5,151.6 r90 top
DA11 "ADM483AR" SOIC-8_1.27_5x4x1.75 148.475,129.725 r90 top
DA12 "ADM483AR" SOIC-8_1.27_5x4x1.75 223,163 r90 bottom
DA13 "SN65HVD75D" SOIC-8_1.27_5x4x1.75 107.55,141.347 r90 top
DA14 "ADM483AR" SOIC-8_1.27_5x4x1.75 132.1,129.7 r90 top
DA15 "SN65HVD75D" SOIC-8_1.27_5x4x1.75 60.6,144.5 r90 top
DA16 "SN65HVD75D" SOIC-8_1.27_5x4x1.75 192.175,154.15 r90 top
DA17 "ADM483AR" SOIC-8_1.27_5x4x1.75 81.4,144.634 r90 top
DA18 "SN65HVD75D" SOIC-8_1.27_5x4x1.75 153.2,150.2 r90 top
DA19 "SN65HVD75D" SOIC-8_1.27_5x4x1.75 131.65,150.2 r90 top
DA20 "BNX028-01" F_BNX028-01 28.4,100.1 r270 top
DA21 "BNX028-01" F_BNX028-01 16.903,128.8 r0 top
DA22 "LD1117AS33TR" SOT-223 45.9,123.5 r90 top
DD1 "EP3C5E144I7" EQFP-144[20x20]_0.5_22x22x1.6 58.5,55.825 r0 top locked
DD2 "O 20,0-JO32-B-3.3-1-T1-LF" JO32 28.05,43.175 r90 top
DD3 "EPCS4SI8N" SOIC-8_1.27_5x4x1.75 33.8,62.425 r270 top
DD4 "STM32F429VIT6STM32F407ZGTx" QFP-144[20x20]_0.5_22x22x1.6 111.912,42.4 r0 top locked
DD5 "USBUF01W6" SOT-323-6 24.7,31.5 r0 top
L1 "0,22 μH" IND_LQH31CN 41,50.025 r90 bottom
L2 "" "IND_0805 [2012 Metric]" 68.2,91 r270 top
L3 "0,22 μH" IND_LQH31CN 77.2,66.625 r270 bottom
L4 "0,22 μH" IND_LQH31CN 48.862,39.025 r180 top
L5 "0,22 μH" IND_LQH31CN 74,68.725 r270 bottom
L6 "" "IND_0805 [2012 Metric]" 68.2,125.175 r270 top
L7 "" "IND_0805 [2012 Metric]" 68.15,108.2 r270 top
L8 "" "IND_0805 [2012 Metric]" 40.3,41.225 r180 top
L9 "" "IND_0805 [2012 Metric]" 86.375,32.8 r0 bottom
L10 "" "IND_0805 [2012 Metric]" 86.375,35.35 r0 bottom
R2 "51R" "R_0805 [2012 Metric]" 40.9,52.025 r90 top
R3 "1k" "R_0805 [2012 Metric]" 24.1,67.275 r0 bottom
R4 "10k" "R_0805 [2012 Metric]" 29.8,52.525 r270 top
R5 "1k" "R_0805 [2012 Metric]" 26.8,57.075 r90 top
R6 "10k" "R_0805 [2012 Metric]" 39.3,57.425 r270 bottom
R7 "1k" "R_0805 [2012 Metric]" 26.773,49.925 r270 bottom
R8 "10k" "R_0805 [2012 Metric]" 39.3,61.525 r90 top
R9 "10k" "R_0805 [2012 Metric]" 77.6,57.525 r90 top
R10 "10k" "R_0805 [2012 Metric]" 104.775,58.1 r0 top
R11 "10k" "R_0805 [2012 Metric]" 111.9,65.4 r0 bottom
R12 "10k" "R_0805 [2012 Metric]" 117.075,65.325 r0 top
R13 "10k" "R_0805 [2012 Metric]" 112.225,65.325 r180 top
R14 "10k" "R_0805 [2012 Metric]" 100.95,40.175 r270 bottom
R15 "10k" "R_0805 [2012 Metric]" 154.405,38.017 r270 bottom
R16 "100R" "R_0805 [2012 Metric]" 150.205,47.842 r0 bottom
R17 "10k" "R_0805 [2012 Metric]" 177.275,38.017 r270 bottom
R18 "100R" "R_0805 [2012 Metric]" 173.1,47.842 r0 bottom
R19 "10k" "R_0805 [2012 Metric]" 205.275,130.375 r270 top
R20 "10k" "R_0805 [2012 Metric]" 23.25,149.35 r270 bottom
R21 "10k" "R_0805 [2012 Metric]" 188.275,130.275 r270 top
R22 "100R" "R_0805 [2012 Metric]" 18.15,159.15 r180 bottom
R23 "100R" "R_0805 [2012 Metric]" 193.375,140.075 r0 top
R24 "100R" "R_0805 [2012 Metric]" 210.375,140.175 r0 top
R25 "1k" "R_1206 [3216 Metric]" 37.9,161.75 r0 top
R26 "100R" "R_0805 [2012 Metric]" 40.45,158.35 r0 top
R27 "1k" "R_1206 [3216 Metric]" 42.9,161.75 r0 top
R28 "10k" "R_0805 [2012 Metric]" 142.975,128.725 r270 top
R29 "10k" "R_0805 [2012 Metric]" 228.5,162 r270 bottom
R30 "100R" "R_0805 [2012 Metric]" 105.4,151.445 r0 top
R31 "100R" "R_0805 [2012 Metric]" 107.5,148.097 r0 top
R32 "100R" "R_0805 [2012 Metric]" 148.475,135.475 r0 top
R33 "100R" "R_0805 [2012 Metric]" 223,168.75 r180 bottom
R34 "1k" "R_1206 [3216 Metric]" 109.95,151.497 r0 top
R35 "10k" "R_0805 [2012 Metric]" 126.6,128.7 r270 top
R36 "10k" "R_0805 [2012 Metric]" 55.1,143.5 r270 top
R37 "1k" "R_1206 [3216 Metric]" 189.575,164.3 r0 top
R38 "100R" "R_0805 [2012 Metric]" 192.125,160.9 r0 top
R39 "100R" "R_0805 [2012 Metric]" 132.1,135.45 r0 top
R40 "100R" "R_0805 [2012 Metric]" 60.6,150.25 r0 top
R41 "1k" "R_1206 [3216 Metric]" 194.575,164.3 r0 top
R42 "10k" "R_0805 [2012 Metric]" 75.9,143.634 r270 top
R43 "1k" "R_1206 [3216 Metric]" 150.6,160.35 r0 top
R44 "100R" "R_0805 [2012 Metric]" 153.15,156.95 r0 top
R45 "100R" "R_0805 [2012 Metric]" 81.4,150.384 r0 top
R46 "1k" "R_1206 [3216 Metric]" 129.05,160.35 r0 top
R47 "100R" "R_0805 [2012 Metric]" 131.6,156.95 r0 top
R48 "1k" "R_1206 [3216 Metric]" 155.6,160.35 r0 top
R49 "1k" "R_1206 [3216 Metric]" 134.05,160.35 r0 top
R50 "30R" "R_0805 [2012 Metric]" 30.475,31.5 r180 top
R51 "10k" "R_0805 [2012 Metric]" 160.875,68.2 r270 bottom
R52 "10k" "R_0805 [2012 Metric]" 155.775,74.6 r270 bottom
R53 "10k" "R_0805 [2012 Metric]" 159.875,63.696 r0 bottom
R54 "10k" "R_0805 [2012 Metric]" 154.775,69.4 r0 bottom
R55 "10k" "R_0805 [2012 Metric]" 146.025,68.776 r180 top
R56 "10k" "R_0805 [2012 Metric]" 146.025,76.396 r180 top
R57 "10k" "R_0805 [2012 Metric]" 247.8,172.8 r0 bottom
R58 "10k" "R_0805 [2012 Metric]" 251.9,185.05 r180 bottom
R59 "10k" "R_0805 [2012 Metric]" 251.925,172.825 r180 bottom
R60 "10k" "R_0805 [2012 Metric]" 257.375,185.05 r0 bottom
R61 "10k" "R_0805 [2012 Metric]" 257.4,172.825 r0 bottom
TP1 "" DSP_1.3 63.874,78.3 r90 top
TP2 "" DSP_1.3 61.25,80.2 r90 top
TP3 "" DSP_1.3 58.626,78.3 r90 top
TP4 "" DSP_1.3 44,40 r90 top
TP5 "" DSP_1.3 37.505,48.875 r90 top
TP6 "" DSP_1.3 44.075,45 r90 top
TP7 "" DSP_1.3 130.35,19.05 r90 top
TP8 "" DSP_1.3 125.35,15 r90 top
TP9 "" DSP_1.3 120.35,19.05 r90 top
TP10 "" DSP_1.3 115.35,15 r90 top
TP11 "" DSP_1.3 110.35,19.05 r90 top
TP12 "" DSP_1.3 105.35,15 r90 top
TP13 "" DSP_1.3 146.63,53.538 r90 top
TP14 "" DSP_1.3 152.5,56.078 r90 top
TP15 "" DSP_1.3 146.63,61.158 r90 top
TP16 "" DSP_1.3 146.63,86.556 r90 top
TP17 "" DSP_1.3 130.09,65.596 r90 top
TP18 "" DSP_1.3 130.09,84.018 r90 top
XP1 "PLD-10" PLD-10 21.77,56.021 r90 top locked
XP2 "AMPMODU II 280372-2" "AMP II-280372-2" 113.045,71.025 r0 top locked
XP3 "BH-40" BH-40 138.36,75.128 r90 top locked
XP4 "BH2-40" BH2-40 33.9,173 r0 top locked
XP5 "BH2-40" BH2-40 73.5,160 r0 top locked
XP6 "BH2-20R" BH2-20R 186.7,180 r0 top locked
XP7 "BH2-40" BH2-40 110.8,173 r0 top locked
XP8 "AMPMODU II 280371-2" "AMP II-280371-2" 27.19,22.15 r0 top locked
XP9 "AMPMODU II 280371-2" "AMP II-280371-2" 13.13,103.5 r0 top locked
XP10 "BH2-20R" BH2-20R 219.5,180 r0 top locked
XP11 "AMPMODU II 280371-2" "AMP II-280371-2" 79.36,12.85 r0 top locked
XP12 "BH2-20R" BH2-20R 252.3,180 r0 top locked
XP13 "BH2-10R" BH2-10R 159,180 r0 top locked
XP14 "AMPMODU II 280371-2" "AMP II-280371-2" 56.215,12.85 r0 top locked
ZQ1 "Q 25.0JXS63-12-30/30-FU" JXS63 111.475,42.75 r90 bottom

## Footprints (in the part's own frame and the unit in brackets; to place one, negate y for a bottom-side part, rotate by r counter-clockwise, add the part's x,y. Pads: shape width x height; smd on the part's side, far side on the other; paste and mask are expansions set on the pad)
"AMP II-280371-2" [mm]
  rect 1.7x1.7 hole 1.1 mask+0.05: 1(-3.81,0)
  round 1.7 hole 1.1 mask+0.05: 2(-1.27,0) 3(1.27,0) 4(3.81,0)
  silkscreen extent -6.4,-2.3 6.4,2.9, body extent -6.22,-2.2 6.22,2.8, height 12.61
"AMP II-280372-2" [mm]
  rect 1.7x1.7 hole 1.1 mask+0.05: 1(-6.35,-0.3)
  round 1.7 hole 1.1 mask+0.05: 2(-3.81,-0.3) 3(-1.27,-0.3) 4(1.27,-0.3) 5(3.81,-0.3) 6(6.35,-0.3)
  silkscreen extent -9,-2.6 9,2.6, body extent -8.76,-2.5 8.76,2.5, height 12.61
BH2-10R [mm]
  rect 1.5x1.5 hole 0.9 mask+0.05: 1(-4,-1)
  round 1.5 hole 0.9 mask+0.05: 2(-4,1) 3(-2,-1) 4(-2,1) 5(0,-1) 6(0,1) 7(2,-1) 8(2,1) 9(4,-1) 10(4,1)
  silkscreen extent -8.55,-1 8.55,8.12, body extent -8.55,-1.25 8.55,8.12, height 5.41
BH2-20R [mm]
  rect 1.5x1.5 hole 0.9 mask+0.05: 1(-9,-1)
  round 1.5 hole 0.9 mask+0.05: 2(-9,1) 3(-7,-1) 4(-7,1) 5(-5,-1) 6(-5,1) 7(-3,-1) 8(-3,1) 9(-1,-1) 10(-1,1) 11(1,-1) 12(1,1) 13(3,-1) 14(3,1) 15(5,-1) 16(5,1) 17(7,-1) 18(7,1) 19(9,-1) 20(9,1)
  silkscreen extent -13.65,-1 13.65,8.12, body extent -13.55,-1.25 13.55,8.12, height 5.41
BH2-40 [mm]
  rect 1.5x1.5 hole 0.9 mask+0.05: 1(-19,-1)
  round 1.5 hole 0.9 mask+0.05: 2(-19,1) 3(-17,-1) 4(-17,1) 5(-15,-1) 6(-15,1) 7(-13,-1) 8(-13,1) 9(-11,-1) 10(-11,1) 11(-9,-1) 12(-9,1) 13(-7,-1) 14(-7,1) 15(-5,-1) 16(-5,1) 17(-3,-1) 18(-3,1) 19(-1,-1) 20(-1,1) 21(1,-1) 22(1,1) 23(3,-1) 24(3,1) 25(5,-1) 26(5,1) 27(7,-1) 28(7,1) 29(9,-1) 30(9,1) 31(11,-1) 32(11,1) 33(13,-1) 34(13,1) 35(15,-1) 36(15,1) 37(17,-1) 38(17,1) 39(19,-1) 40(19,1)
  silkscreen extent -23.65,-2.75 23.65,2.75, body extent -23.55,-2.7 23.55,2.7, height 5.61
BH-40 [mm]
  rect 1.7x1.7 hole 1.1 mask+0.05: 1(-24.13,-1.27)
  round 1.7 hole 1.1 mask+0.05: 2(-24.13,1.27) 3(-21.59,-1.27) 4(-21.59,1.27) 5(-19.05,-1.27) 6(-19.05,1.27) 7(-16.51,-1.27) 8(-16.51,1.27) 9(-13.97,-1.27) 10(-13.97,1.27) 11(-11.43,-1.27) 12(-11.43,1.27) 13(-8.89,-1.27) 14(-8.89,1.27) 15(-6.35,-1.27) 16(-6.35,1.27) 17(-3.81,-1.27) 18(-3.81,1.27) 19(-1.27,-1.27) 20(-1.27,1.27) 21(1.27,-1.27) 22(1.27,1.27) 23(3.81,-1.27) 24(3.81,1.27) 25(6.35,-1.27) 26(6.35,1.27) 27(8.89,-1.27) 28(8.89,1.27) 29(11.43,-1.27) 30(11.43,1.27) 31(13.97,-1.27) 32(13.97,1.27) 33(16.51,-1.27) 34(16.51,1.27) 35(19.05,-1.27) 36(19.05,1.27) 37(21.59,-1.27) 38(21.59,1.27) 39(24.13,-1.27) 40(24.13,1.27)
  silkscreen extent -29.31,-4.5 29.09,4.7, body extent -29.2,-4.55 29.2,4.55, height 5.61
"C+_1206 [3216-18 Metric]" [mm]
  rect 1.6x1.8 smd mask+0.05: +(-1.45,0) -(1.45,0)
  Top pour cut-out: -2.7,1.4 2.7,1.4 2.7,-1.4 -2.7,-1.4
  silkscreen extent -2.7,-1.4 2.7,1.4, body extent -1.55,-0.77 1.65,0.77, height 1.8
"C+_1210 [3528-21 Metric]" [mm]
  rect 1.6x2.8 smd mask+0.05: +(-1.45,0) -(1.45,0)
  Top pour cut-out: -2.7,1.8 2.7,1.8 2.7,-1.8 -2.7,-1.8
  silkscreen extent -2.7,-1.8 2.7,1.8, body extent -1.85,-1.5 1.85,1.5, height 2.16
"C_0805 [2012 Metric]" [mm]
  rect 1.3x1.8 smd mask+0.05: 1(-1,0) 2(1,0)
  Top pour cut-out: -1.8,1.05 1.8,1.05 1.8,-1.05 -1.8,-1.05
  body extent -1,-0.6 1,0.6, height 1.3
DSP_1.3 [mm]
  round 2.1 hole 1.3 mask+0.05: 1(0,0)
EQFP-144[20x20]_0.5_22x22x1.6 [mm]
  oct 2x0.3 smd mask+0.05: 1(-10.988,8.75)
  rect 2x0.3 smd mask+0.05: 2(-10.988,8.25) 3(-10.988,7.75) 4(-10.988,7.25) 5(-10.988,6.75) 6(-10.988,6.25) 7(-10.988,5.75) 8(-10.988,5.25) 9(-10.988,4.75) 10(-10.988,4.25) 11(-10.988,3.75) 12(-10.988,3.25) 13(-10.988,2.75) 14(-10.988,2.25) 15(-10.988,1.75) 16(-10.988,1.25) 17(-10.988,0.75) 18(-10.988,0.25) 19(-10.988,-0.25) 20(-10.988,-0.75) 21(-10.988,-1.25) 22(-10.988,-1.75) 23(-10.988,-2.25) 24(-10.988,-2.75) 25(-10.988,-3.25) 26(-10.988,-3.75) 27(-10.988,-4.25) 28(-10.988,-4.75) 29(-10.988,-5.25) 30(-10.988,-5.75) 31(-10.988,-6.25) 32(-10.988,-6.75) 33(-10.988,-7.25) 34(-10.988,-7.75) 35(-10.988,-8.25) 36(-10.988,-8.75) 73(10.988,-8.75) 74(10.988,-8.25) 75(10.988,-7.75) 76(10.988,-7.25) 77(10.988,-6.75) 78(10.988,-6.25) 79(10.988,-5.75) 80(10.988,-5.25) 81(10.988,-4.75) 82(10.988,-4.25) 83(10.988,-3.75) 84(10.988,-3.25) 85(10.988,-2.75) 86(10.988,-2.25) 87(10.988,-1.75) 88(10.988,-1.25) 89(10.988,-0.75) 90(10.988,-0.25) 91(10.988,0.25) 92(10.988,0.75) 93(10.988,1.25) 94(10.988,1.75) 95(10.988,2.25) 96(10.988,2.75) 97(10.988,3.25) 98(10.988,3.75) 99(10.988,4.25) 100(10.988,4.75) 101(10.988,5.25) 102(10.988,5.75) 103(10.988,6.25) 104(10.988,6.75) 105(10.988,7.25) 106(10.988,7.75) 107(10.988,8.25) 108(10.988,8.75)
  rect 0.3x2 smd mask+0.05: 37(-8.75,-10.988) 38(-8.25,-10.988) 39(-7.75,-10.988) 40(-7.25,-10.988) 41(-6.75,-10.988) 42(-6.25,-10.988) 43(-5.75,-10.988) 44(-5.25,-10.988) 45(-4.75,-10.988) 46(-4.25,-10.988) 47(-3.75,-10.988) 48(-3.25,-10.988) 49(-2.75,-10.988) 50(-2.25,-10.988) 51(-1.75,-10.988) 52(-1.25,-10.988) 53(-0.75,-10.988) 54(-0.25,-10.988) 55(0.25,-10.988) 56(0.75,-10.988) 57(1.25,-10.988) 58(1.75,-10.988) 59(2.25,-10.988) 60(2.75,-10.988) 61(3.25,-10.988) 62(3.75,-10.988) 63(4.25,-10.988) 64(4.75,-10.988) 65(5.25,-10.988) 66(5.75,-10.988) 67(6.25,-10.988) 68(6.75,-10.988) 69(7.25,-10.988) 70(7.75,-10.988) 71(8.25,-10.988) 72(8.75,-10.988) 109(8.75,10.988) 110(8.25,10.988) 111(7.75,10.988) 112(7.25,10.988) 113(6.75,10.988) 114(6.25,10.988) 115(5.75,10.988) 116(5.25,10.988) 117(4.75,10.988) 118(4.25,10.988) 119(3.75,10.988) 120(3.25,10.988) 121(2.75,10.988) 122(2.25,10.988) 123(1.75,10.988) 124(1.25,10.988) 125(0.75,10.988) 126(0.25,10.988) 127(-0.25,10.988) 128(-0.75,10.988) 129(-1.25,10.988) 130(-1.75,10.988) 131(-2.25,10.988) 132(-2.75,10.988) 133(-3.25,10.988) 134(-3.75,10.988) 135(-4.25,10.988) 136(-4.75,10.988) 137(-5.25,10.988) 138(-5.75,10.988) 139(-6.25,10.988) 140(-6.75,10.988) 141(-7.25,10.988) 142(-7.75,10.988) 143(-8.25,10.988) 144(-8.75,10.988)
  round 1.5 hole 0.9 mask+0.05: 145(-2.3,-2.3) 145(-2.3,2.3) 145(0,0) 145(2.3,-2.3) 145(2.3,2.3)
  Top region: -5.515,-5.5 5.485,-5.5 5.485,5.5 -5.515,5.5
  silkscreen extent -12.45,-12.45 12.45,12.45, body extent -11,-11 11,11, height 1.65
F_BNX028-01 [mm]
  rect 1.7x1.8 smd mask+0.05: 1(-5.7,2.1) 2(5.7,2.1) 3(-5.7,-2.1) 4(5.7,-2.1)
  rect 8x1.5 smd mask+0.05: 4(1,-4.8)
  rect 3.5x1.5 smd mask+0.05: 4(3.25,4.8)
  silkscreen extent -6.07,-4.55 6.05,4.55, body extent -6.05,-4.55 6.05,4.55, height 3.71
"IND_0805 [2012 Metric]" [mm]
  rect 1.2x1.5 smd mask+0.05: 1(-0.9,0) 2(0.9,0)
  Top pour cut-out: -1.75,1 1.75,1 1.75,-1 -1.75,-1
  body extent -1,-0.63 1,0.63, height 1.1
IND_LQH31CN [mm]
  rect 1.6x2.1 smd mask+0.05: 1(-1.4,0) 2(1.4,0)
  Top pour cut-out: -2.5,1.4 2.5,1.4 2.5,-1.4 -2.5,-1.4
  body extent -1.6,-1.15 1.6,1.15, height 2
JO32 [mm]
  rect 1.5x1.3 smd mask+0.05: 1(-1.25,-1.025) 2(1.25,-1.025) 3(1.25,1.025) 4(-1.25,1.025)
  body extent -1.6,-1.25 1.6,1.25, height 1.15
JXS63 [mm]
  rect 2.2x1.5 smd mask+0.05: 1(-2.2,-1.25) 2(2.2,-1.25) 3(2.2,1.25) 4(-2.2,1.25)
  silkscreen extent -0.6,-1.75 0.6,1.75, body extent -3,-1.75 3,1.75, height 1.02
Orange_Pi_5_Plus [mm]
  round 3.4 hole 3.4 unplated mask+0.3: 0(-87.084,-49.208) 0(-87.084,0) 0(0,-49.208) 0(0,0)
  Keep-Out Layer circle w0.25: c0,0 r3.5
  Keep-Out Layer circle w0.25: c-87.084,0 r3.5
  Keep-Out Layer circle w0.25: c-87.084,-49.208 r3.5
  Keep-Out Layer circle w0.25: c0,-49.208 r3.5
  silkscreen extent -96.89,-68.84 3.11,6.16, body extent -97,-72.89 3.39,8.51, height 28.06
PLD-10 [mm]
  rect 1.7x1.7 hole 1.1 mask+0.05: 1(-5.08,-1.27)
  round 1.7 hole 1.1 mask+0.05: 2(-5.08,1.27) 3(-2.54,-1.27) 4(-2.54,1.27) 5(0,-1.27) 6(0,1.27) 7(2.54,-1.27) 8(2.54,1.27) 9(5.08,-1.27) 10(5.08,1.27)
  silkscreen extent -6.4,-2.6 6.4,2.6, body extent -6.35,-2.54 6.35,2.54, height 8.54
QFP-144[20x20]_0.5_22x22x1.6 [mm]
  oct 2x0.3 smd mask+0.05: 1(-10.988,8.75)
  rect 2x0.3 smd mask+0.05: 2(-10.988,8.25) 3(-10.988,7.75) 4(-10.988,7.25) 5(-10.988,6.75) 6(-10.988,6.25) 7(-10.988,5.75) 8(-10.988,5.25) 9(-10.988,4.75) 10(-10.988,4.25) 11(-10.988,3.75) 12(-10.988,3.25) 13(-10.988,2.75) 14(-10.988,2.25) 15(-10.988,1.75) 16(-10.988,1.25) 17(-10.988,0.75) 18(-10.988,0.25) 19(-10.988,-0.25) 20(-10.988,-0.75) 21(-10.988,-1.25) 22(-10.988,-1.75) 23(-10.988,-2.25) 24(-10.988,-2.75) 25(-10.988,-3.25) 26(-10.988,-3.75) 27(-10.988,-4.25) 28(-10.988,-4.75) 29(-10.988,-5.25) 30(-10.988,-5.75) 31(-10.988,-6.25) 32(-10.988,-6.75) 33(-10.988,-7.25) 34(-10.988,-7.75) 35(-10.988,-8.25) 36(-10.988,-8.75) 73(10.988,-8.75) 74(10.988,-8.25) 75(10.988,-7.75) 76(10.988,-7.25) 77(10.988,-6.75) 78(10.988,-6.25) 79(10.988,-5.75) 80(10.988,-5.25) 81(10.988,-4.75) 82(10.988,-4.25) 83(10.988,-3.75) 84(10.988,-3.25) 85(10.988,-2.75) 86(10.988,-2.25) 87(10.988,-1.75) 88(10.988,-1.25) 89(10.988,-0.75) 90(10.988,-0.25) 91(10.988,0.25) 92(10.988,0.75) 93(10.988,1.25) 94(10.988,1.75) 95(10.988,2.25) 96(10.988,2.75) 97(10.988,3.25) 98(10.988,3.75) 99(10.988,4.25) 100(10.988,4.75) 101(10.988,5.25) 102(10.988,5.75) 103(10.988,6.25) 104(10.988,6.75) 105(10.988,7.25) 106(10.988,7.75) 107(10.988,8.25) 108(10.988,8.75)
  rect 0.3x2 smd mask+0.05: 37(-8.75,-10.988) 38(-8.25,-10.988) 39(-7.75,-10.988) 40(-7.25,-10.988) 41(-6.75,-10.988) 42(-6.25,-10.988) 43(-5.75,-10.988) 44(-5.25,-10.988) 45(-4.75,-10.988) 46(-4.25,-10.988) 47(-3.75,-10.988) 48(-3.25,-10.988) 49(-2.75,-10.988) 50(-2.25,-10.988) 51(-1.75,-10.988) 52(-1.25,-10.988) 53(-0.75,-10.988) 54(-0.25,-10.988) 55(0.25,-10.988) 56(0.75,-10.988) 57(1.25,-10.988) 58(1.75,-10.988) 59(2.25,-10.988) 60(2.75,-10.988) 61(3.25,-10.988) 62(3.75,-10.988) 63(4.25,-10.988) 64(4.75,-10.988) 65(5.25,-10.988) 66(5.75,-10.988) 67(6.25,-10.988) 68(6.75,-10.988) 69(7.25,-10.988) 70(7.75,-10.988) 71(8.25,-10.988) 72(8.75,-10.988) 109(8.75,10.988) 110(8.25,10.988) 111(7.75,10.988) 112(7.25,10.988) 113(6.75,10.988) 114(6.25,10.988) 115(5.75,10.988) 116(5.25,10.988) 117(4.75,10.988) 118(4.25,10.988) 119(3.75,10.988) 120(3.25,10.988) 121(2.75,10.988) 122(2.25,10.988) 123(1.75,10.988) 124(1.25,10.988) 125(0.75,10.988) 126(0.25,10.988) 127(-0.25,10.988) 128(-0.75,10.988) 129(-1.25,10.988) 130(-1.75,10.988) 131(-2.25,10.988) 132(-2.75,10.988) 133(-3.25,10.988) 134(-3.75,10.988) 135(-4.25,10.988) 136(-4.75,10.988) 137(-5.25,10.988) 138(-5.75,10.988) 139(-6.25,10.988) 140(-6.75,10.988) 141(-7.25,10.988) 142(-7.75,10.988) 143(-8.25,10.988) 144(-8.75,10.988)
  silkscreen extent -12.45,-12.45 12.45,12.45, body extent -11,-11 11,11, height 1.6
"R_0805 [2012 Metric]" [mm]
  rect 1.1x1.9 smd mask+0.05: 1(-1,0) 2(1,0)
  Top pour cut-out: -1.8,1.2 1.9,1.2 1.9,-1.2 -1.8,-1.2
  body extent -1,-0.63 1,0.63, height 1.47
"R_1206 [3216 Metric]" [mm]
  rect 1.5x2.1 smd paste-0.025 mask+0.05: 1(-1.5,0) 2(1.5,0)
  Top pour cut-out: -2.5,1.3 2.5,1.3 2.5,-1.3 -2.5,-1.3
  body extent -1.6,-0.8 1.6,0.8, height 1.6
SOIC-8_1.27_5x4x1.75 [mm]
  oct 1.9x0.8 smd mask+0.05: 1(-2.75,1.905)
  rect 1.9x0.8 smd mask+0.05: 2(-2.75,0.635) 3(-2.75,-0.635) 4(-2.75,-1.905) 5(2.75,-1.905) 6(2.75,-0.635) 7(2.75,0.635) 8(2.75,1.905)
  silkscreen extent -1.33,-2.63 1.33,3.15, body extent -3.01,-2.45 3.01,2.45, height 1.64
SOT-223 [mm]
  oct 2.3x1.2 smd mask+0.05: 1(-2.9,2.3)
  rect 2.3x1.2 smd mask+0.05: 2(-2.9,0) 3(-2.9,-2.3)
  rect 2.3x3.5 smd mask+0.05: 4(2.9,0)
  silkscreen extent -1.25,-3.35 1.25,3.85, body extent -3.64,-3.35 3.64,3.35, height 1.81
SOT-323-6 [mm]
  oct 1.1x0.45 smd mask+0.05: 1(-1.15,0.65)
  rect 1.1x0.45 smd mask+0.05: 2(-1.15,0) 3(-1.15,-0.65) 4(1.15,-0.65) 5(1.15,0) 6(1.15,0.65)
  silkscreen extent -2.12,-1.28 2.12,1.85, body extent -1.19,-1.1 1.19,1.1, height 1.09
С_EXR_10x21 [mm]
  round 1.5 hole 0.9 mask+0.05: +(-2.5,0) -(2.5,0)
  Top pour cut-out: -5.2,-0.096 -4.514,2.51 -2.635,4.441 -0.048,5.198 -0.048,5.198 1.979,4.795 3.698,3.646 4.847,1.927 5.25,-0.1 5.25,-0.1 4.826,-2.14 3.623,-3.842 1.842,-4.923 -0.223,-5.205 -0.223,-5.205 -2.722,-4.477 -4.537,-2.613 -5.2,-0.096
  silkscreen extent -5,-5 5,5, body extent -5,-5 5,5, height 21